# EAGLE board RedBot Accelerometer-Panel (EAGLE 9.6.0), part 1 of 6
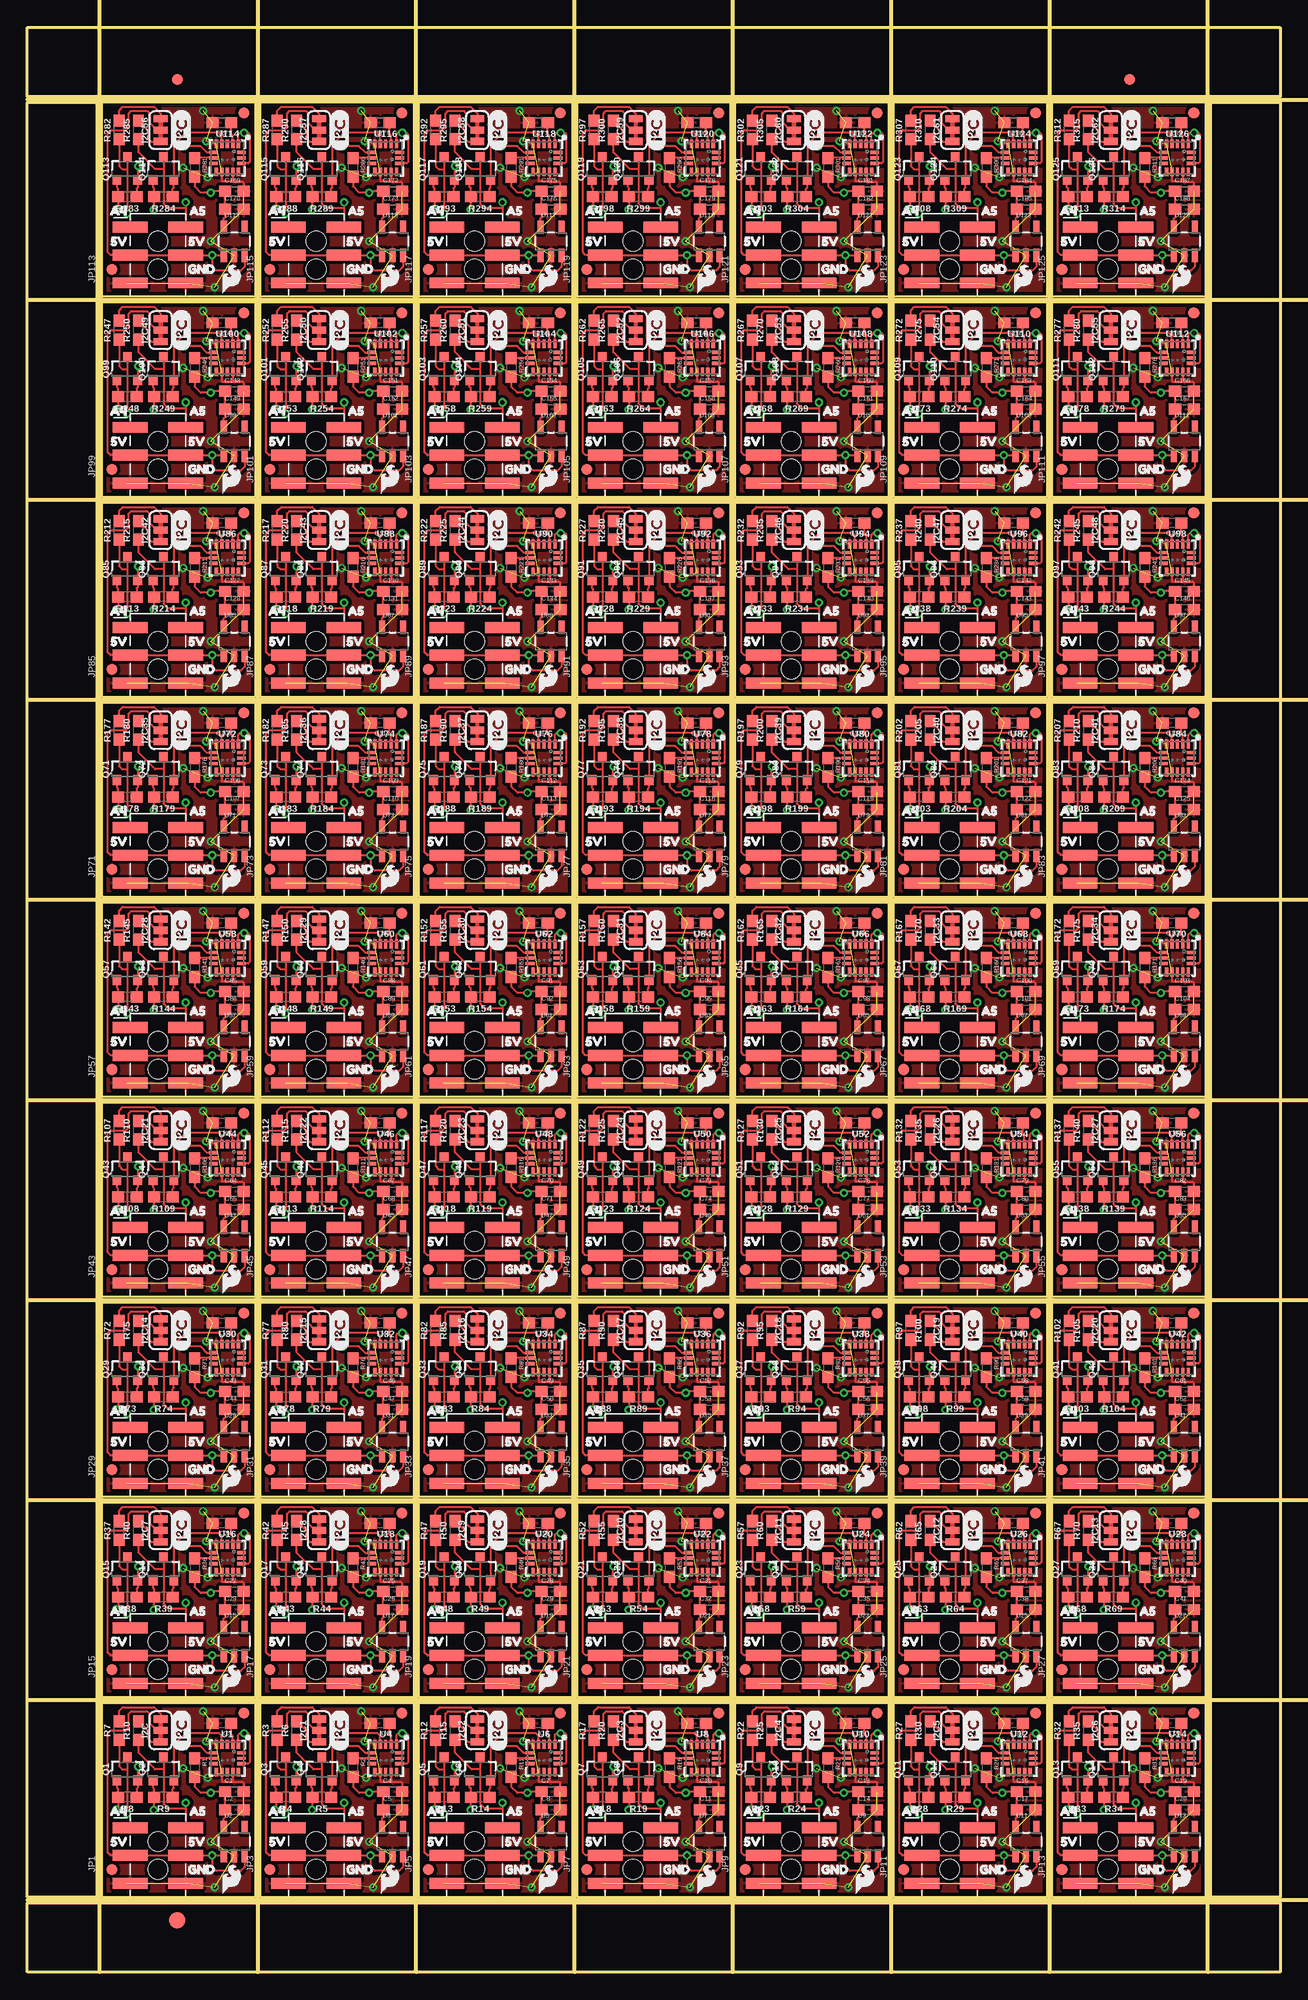
[diagram p0: board, top side]
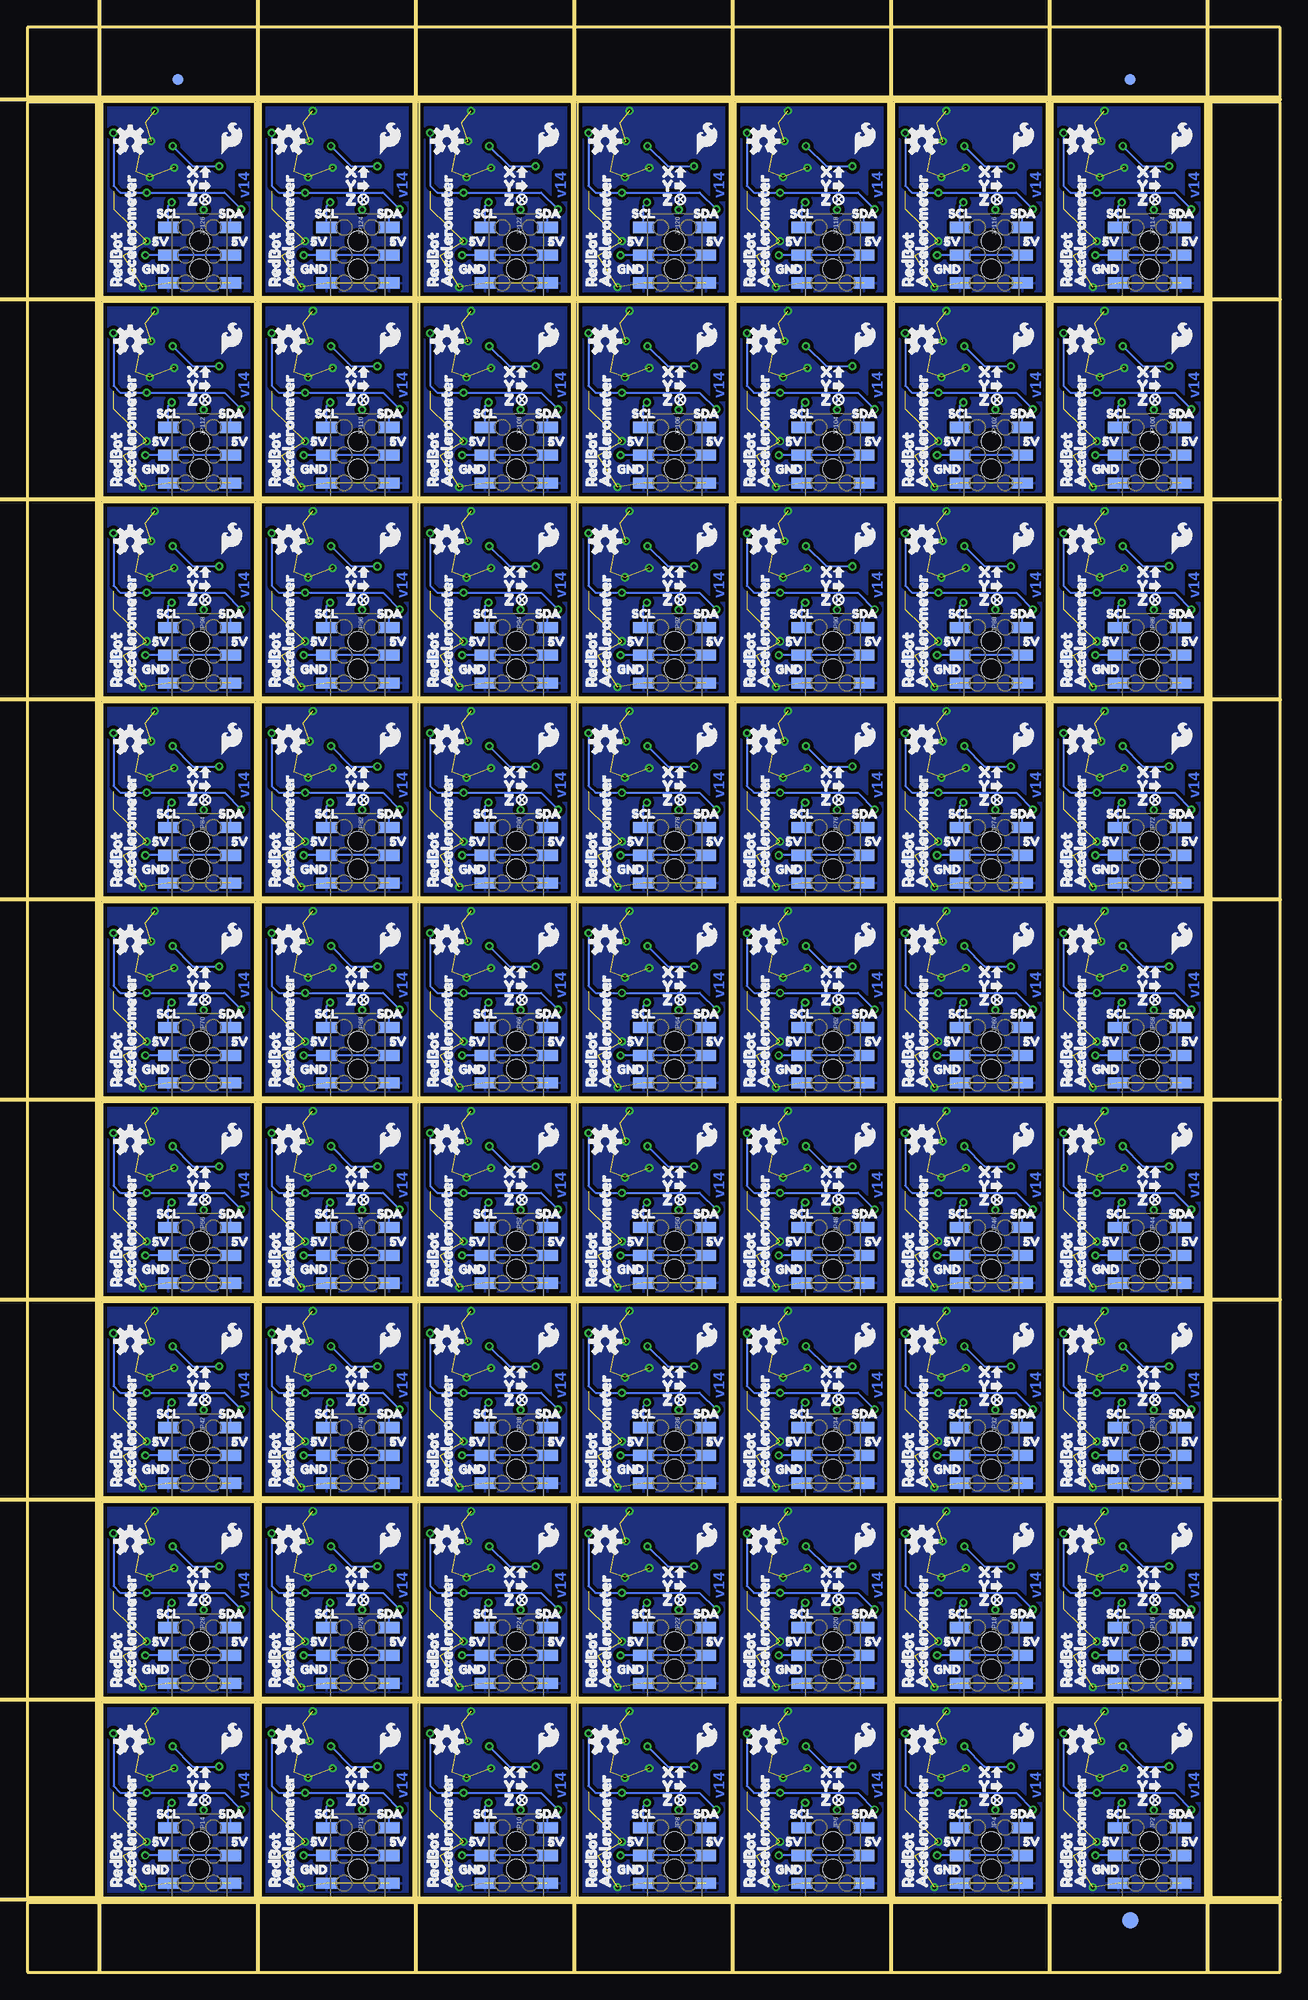
[diagram p1: board, bottom side, seen from below]

Size 114.55 x 177.8 mm. Coordinates in mm from the lower left corner, seen from the top.
Outline: 268 segments
Copper layers (1*16): Top 0.035mm / dielectric 1.5mm / Bottom 0.035mm
Design rules "RedBot": minimum track width 7mil, minimum drill 15mil, track to track 7mil, track to pad 7mil, pad to pad 7mil, via to via 7mil, smd to smd 7mil, copper to edge 7mil, drill to drill 7mil, minimum pad ring 7mil, minimum via ring 7mil, stop-mask expansion 4mil, vias tented up to drill 25mil, thermal gap 10mil
Milling: 18 lines

## Footprints (pad centres in the part's own frame; a part is rotated, then mirrored left to right if it is on the bottom)
0603 = smd 1.1 x 1: 1 -0.85,0; 2 0.85,0
FIDUCIAL-1X2 = smd 1 x 1: 1 0,0
FIDUCIAL-1.5X3 = smd 1.5 x 1.5: 1 0,0
SMT-JUMPER_3_2-NC_TRACE_SILK = smd 0.66 x 1.27: 1 -1.041,0; 2 0,0; 3 1.041,0
2X3_SMT_POSTS = smd 1 x 3.17: 1 -2.54,-2.54; 2 -2.54,2.54; 3 0,-2.54; 4 0,2.54; 5 2.54,-2.54; 6 2.54,2.54 | hole 1.8: -1.27,0; 1.27,0
2X3_SMD = smd 1.02 x 1.9: 1 -2.54,-2.85; 2 -2.54,2.85; 3 0,-2.85; 4 0,2.85; 5 2.54,-2.85; 6 2.54,2.85
SOT23-3 = smd 0.8 x 0.9: 1 -0.95,-1; 2 0.95,-1; 3 0,1.1
QFN-16 = smd 0.8 x 0.3: 1 -1.275,1; 2 -1.275,0.5; 3 -1.275,0; 4 -1.275,-0.5; 5 -1.275,-1; 9 1.275,-1; 10 1.275,-0.5; 11 1.275,0; 12 1.275,0.5; 13 1.275,1 | smd 0.3 x 0.8: 6 -0.5,-1.275; 7 0,-1.275; 8 0.5,-1.275; 14 0.5,1.275; 15 0,1.275; 16 -0.5,1.275
SOT23-5 = smd 0.55 x 1.2: 1 -0.95,-1.3; 2 0,-1.3; 3 0.95,-1.3; 4 0.95,1.3; 5 -0.95,1.3

## Placement (x,y rotation side)
C1  0.1uF  [0603]  18.92,16.51 0 top
C2  4.7uF  [0603]  18.92,14.86 0 top
C3  0.1uF  [0603]  17.78,22.76 180 top
C4  0.1uF  [0603]  33.4,16.51 0 top
C5  4.7uF  [0603]  33.4,14.86 0 top
C6  0.1uF  [0603]  32.26,22.76 180 top
C7  0.1uF  [0603]  47.88,16.51 0 top
C8  4.7uF  [0603]  47.88,14.86 0 top
C9  0.1uF  [0603]  46.74,22.76 180 top
C10  0.1uF  [0603]  62.36,16.51 0 top
C11  4.7uF  [0603]  62.36,14.86 0 top
C12  0.1uF  [0603]  61.21,22.76 180 top
C13  0.1uF  [0603]  76.84,16.51 0 top
C14  4.7uF  [0603]  76.84,14.86 0 top
C15  0.1uF  [0603]  75.69,22.76 180 top
C16  0.1uF  [0603]  91.31,16.51 0 top
C17  4.7uF  [0603]  91.31,14.86 0 top
C18  0.1uF  [0603]  90.17,22.76 180 top
C19  0.1uF  [0603]  105.79,16.51 0 top
C20  4.7uF  [0603]  105.79,14.86 0 top
C21  0.1uF  [0603]  104.65,22.76 180 top
C22  0.1uF  [0603]  18.92,34.8 0 top
C23  4.7uF  [0603]  18.92,33.15 0 top
C24  0.1uF  [0603]  17.78,41.05 180 top
C25  0.1uF  [0603]  33.4,34.8 0 top
C26  4.7uF  [0603]  33.4,33.15 0 top
C27  0.1uF  [0603]  32.26,41.05 180 top
C28  0.1uF  [0603]  47.88,34.8 0 top
C29  4.7uF  [0603]  47.88,33.15 0 top
C30  0.1uF  [0603]  46.74,41.05 180 top
C31  0.1uF  [0603]  62.36,34.8 0 top
C32  4.7uF  [0603]  62.36,33.15 0 top
C33  0.1uF  [0603]  61.21,41.05 180 top
C34  0.1uF  [0603]  76.84,34.8 0 top
C35  4.7uF  [0603]  76.84,33.15 0 top
C36  0.1uF  [0603]  75.69,41.05 180 top
C37  0.1uF  [0603]  91.31,34.8 0 top
C38  4.7uF  [0603]  91.31,33.15 0 top
C39  0.1uF  [0603]  90.17,41.05 180 top
C40  0.1uF  [0603]  105.79,34.8 0 top
C41  4.7uF  [0603]  105.79,33.15 0 top
C42  0.1uF  [0603]  104.65,41.05 180 top
C43  0.1uF  [0603]  18.92,53.09 0 top
C44  4.7uF  [0603]  18.92,51.43 0 top
C45  0.1uF  [0603]  17.78,59.34 180 top
C46  0.1uF  [0603]  33.4,53.09 0 top
C47  4.7uF  [0603]  33.4,51.43 0 top
C48  0.1uF  [0603]  32.26,59.34 180 top
C49  0.1uF  [0603]  47.88,53.09 0 top
C50  4.7uF  [0603]  47.88,51.43 0 top
C51  0.1uF  [0603]  46.74,59.34 180 top
C52  0.1uF  [0603]  62.36,53.09 0 top
C53  4.7uF  [0603]  62.36,51.43 0 top
C54  0.1uF  [0603]  61.21,59.34 180 top
C55  0.1uF  [0603]  76.84,53.09 0 top
C56  4.7uF  [0603]  76.84,51.43 0 top
C57  0.1uF  [0603]  75.69,59.34 180 top
C58  0.1uF  [0603]  91.31,53.09 0 top
C59  4.7uF  [0603]  91.31,51.43 0 top
C60  0.1uF  [0603]  90.17,59.34 180 top
C61  0.1uF  [0603]  105.79,53.09 0 top
C62  4.7uF  [0603]  105.79,51.43 0 top
C63  0.1uF  [0603]  104.65,59.34 180 top
C64  0.1uF  [0603]  18.92,71.37 0 top
C65  4.7uF  [0603]  18.92,69.72 0 top
C66  0.1uF  [0603]  17.78,77.62 180 top
C67  0.1uF  [0603]  33.4,71.37 0 top
C68  4.7uF  [0603]  33.4,69.72 0 top
C69  0.1uF  [0603]  32.26,77.62 180 top
C70  0.1uF  [0603]  47.88,71.37 0 top
C71  4.7uF  [0603]  47.88,69.72 0 top
C72  0.1uF  [0603]  46.74,77.62 180 top
C73  0.1uF  [0603]  62.36,71.37 0 top
C74  4.7uF  [0603]  62.36,69.72 0 top
C75  0.1uF  [0603]  61.21,77.62 180 top
C76  0.1uF  [0603]  76.84,71.37 0 top
C77  4.7uF  [0603]  76.84,69.72 0 top
C78  0.1uF  [0603]  75.69,77.62 180 top
C79  0.1uF  [0603]  91.31,71.37 0 top
C80  4.7uF  [0603]  91.31,69.72 0 top
C81  0.1uF  [0603]  90.17,77.62 180 top
C82  0.1uF  [0603]  105.79,71.37 0 top
C83  4.7uF  [0603]  105.79,69.72 0 top
C84  0.1uF  [0603]  104.65,77.62 180 top
C85  0.1uF  [0603]  18.92,89.66 0 top
C86  4.7uF  [0603]  18.92,88.01 0 top
C87  0.1uF  [0603]  17.78,95.91 180 top
C88  0.1uF  [0603]  33.4,89.66 0 top
C89  4.7uF  [0603]  33.4,88.01 0 top
C90  0.1uF  [0603]  32.26,95.91 180 top
C91  0.1uF  [0603]  47.88,89.66 0 top
C92  4.7uF  [0603]  47.88,88.01 0 top
C93  0.1uF  [0603]  46.74,95.91 180 top
C94  0.1uF  [0603]  62.36,89.66 0 top
C95  4.7uF  [0603]  62.36,88.01 0 top
C96  0.1uF  [0603]  61.21,95.91 180 top
C97  0.1uF  [0603]  76.84,89.66 0 top
C98  4.7uF  [0603]  76.84,88.01 0 top
C99  0.1uF  [0603]  75.69,95.91 180 top
C100  0.1uF  [0603]  91.31,89.66 0 top
C101  4.7uF  [0603]  91.31,88.01 0 top
C102  0.1uF  [0603]  90.17,95.91 180 top
C103  0.1uF  [0603]  105.79,89.66 0 top
C104  4.7uF  [0603]  105.79,88.01 0 top
C105  0.1uF  [0603]  104.65,95.91 180 top
C106  0.1uF  [0603]  18.92,107.95 0 top
C107  4.7uF  [0603]  18.92,106.3 0 top
C108  0.1uF  [0603]  17.78,114.2 180 top
C109  0.1uF  [0603]  33.4,107.95 0 top
C110  4.7uF  [0603]  33.4,106.3 0 top
C111  0.1uF  [0603]  32.26,114.2 180 top
C112  0.1uF  [0603]  47.88,107.95 0 top
C113  4.7uF  [0603]  47.88,106.3 0 top
C114  0.1uF  [0603]  46.74,114.2 180 top
C115  0.1uF  [0603]  62.36,107.95 0 top
C116  4.7uF  [0603]  62.36,106.3 0 top
C117  0.1uF  [0603]  61.21,114.2 180 top
C118  0.1uF  [0603]  76.84,107.95 0 top
C119  4.7uF  [0603]  76.84,106.3 0 top
C120  0.1uF  [0603]  75.69,114.2 180 top
C121  0.1uF  [0603]  91.31,107.95 0 top
C122  4.7uF  [0603]  91.31,106.3 0 top
C123  0.1uF  [0603]  90.17,114.2 180 top
C124  0.1uF  [0603]  105.79,107.95 0 top
C125  4.7uF  [0603]  105.79,106.3 0 top
C126  0.1uF  [0603]  104.65,114.2 180 top
C127  0.1uF  [0603]  18.92,126.24 0 top
C128  4.7uF  [0603]  18.92,124.59 0 top
C129  0.1uF  [0603]  17.78,132.49 180 top
C130  0.1uF  [0603]  33.4,126.24 0 top
C131  4.7uF  [0603]  33.4,124.59 0 top
C132  0.1uF  [0603]  32.26,132.49 180 top
C133  0.1uF  [0603]  47.88,126.24 0 top
C134  4.7uF  [0603]  47.88,124.59 0 top
C135  0.1uF  [0603]  46.74,132.49 180 top
C136  0.1uF  [0603]  62.36,126.24 0 top
C137  4.7uF  [0603]  62.36,124.59 0 top
C138  0.1uF  [0603]  61.21,132.49 180 top
C139  0.1uF  [0603]  76.84,126.24 0 top
C140  4.7uF  [0603]  76.84,124.59 0 top
C141  0.1uF  [0603]  75.69,132.49 180 top
C142  0.1uF  [0603]  91.31,126.24 0 top
C143  4.7uF  [0603]  91.31,124.59 0 top
C144  0.1uF  [0603]  90.17,132.49 180 top
C145  0.1uF  [0603]  105.79,126.24 0 top
C146  4.7uF  [0603]  105.79,124.59 0 top
C147  0.1uF  [0603]  104.65,132.49 180 top
C148  0.1uF  [0603]  18.92,144.53 0 top
C149  4.7uF  [0603]  18.92,142.88 0 top
C150  0.1uF  [0603]  17.78,150.78 180 top
C151  0.1uF  [0603]  33.4,144.53 0 top
C152  4.7uF  [0603]  33.4,142.88 0 top
C153  0.1uF  [0603]  32.26,150.78 180 top
C154  0.1uF  [0603]  47.88,144.53 0 top
C155  4.7uF  [0603]  47.88,142.88 0 top
C156  0.1uF  [0603]  46.74,150.78 180 top
C157  0.1uF  [0603]  62.36,144.53 0 top
C158  4.7uF  [0603]  62.36,142.88 0 top
C159  0.1uF  [0603]  61.21,150.78 180 top
C160  0.1uF  [0603]  76.84,144.53 0 top
C161  4.7uF  [0603]  76.84,142.88 0 top
C162  0.1uF  [0603]  75.69,150.78 180 top
C163  0.1uF  [0603]  91.31,144.53 0 top
C164  4.7uF  [0603]  91.31,142.88 0 top
C165  0.1uF  [0603]  90.17,150.78 180 top
C166  0.1uF  [0603]  105.79,144.53 0 top
C167  4.7uF  [0603]  105.79,142.88 0 top
C168  0.1uF  [0603]  104.65,150.78 180 top
C169  0.1uF  [0603]  18.92,162.81 0 top
C170  4.7uF  [0603]  18.92,161.16 0 top
C171  0.1uF  [0603]  17.78,169.06 180 top
C172  0.1uF  [0603]  33.4,162.81 0 top
C173  4.7uF  [0603]  33.4,161.16 0 top
C174  0.1uF  [0603]  32.26,169.06 180 top
C175  0.1uF  [0603]  47.88,162.81 0 top
C176  4.7uF  [0603]  47.88,161.16 0 top
C177  0.1uF  [0603]  46.74,169.06 180 top
C178  0.1uF  [0603]  62.36,162.81 0 top
C179  4.7uF  [0603]  62.36,161.16 0 top
C180  0.1uF  [0603]  61.21,169.06 180 top
C181  0.1uF  [0603]  76.84,162.81 0 top
C182  4.7uF  [0603]  76.84,161.16 0 top
C183  0.1uF  [0603]  75.69,169.06 180 top
C184  0.1uF  [0603]  91.31,162.81 0 top
C185  4.7uF  [0603]  91.31,161.16 0 top
C186  0.1uF  [0603]  90.17,169.06 180 top
C187  0.1uF  [0603]  105.79,162.81 0 top
C188  4.7uF  [0603]  105.79,161.16 0 top
C189  0.1uF  [0603]  104.65,169.06 180 top
E$1  [FIDUCIAL-1X2]  13.72,173.04 0 top
E$2  [FIDUCIAL-1X2]  13.72,173.04 0 bottom
E$3  [FIDUCIAL-1X2]  100.77,173.04 0 top
E$4  [FIDUCIAL-1X2]  100.77,173.04 0 bottom
E$5  [FIDUCIAL-1.5X3]  13.72,4.76 0 top
E$6  [FIDUCIAL-1.5X3]  13.72,4.76 0 bottom
FID1  FIDUCIAL1X2  [FIDUCIAL-1X2]  19.79,23.67 0 top
FID2  FIDUCIAL1X2  [FIDUCIAL-1X2]  22.2,9.37 0 top
FID3  FIDUCIAL1X2  [FIDUCIAL-1X2]  7.72,9.37 0 top
FID4  FIDUCIAL1X2  [FIDUCIAL-1X2]  34.26,23.67 0 top
FID5  FIDUCIAL1X2  [FIDUCIAL-1X2]  36.68,9.37 0 top
FID6  FIDUCIAL1X2  [FIDUCIAL-1X2]  48.74,23.67 0 top
FID7  FIDUCIAL1X2  [FIDUCIAL-1X2]  51.16,9.37 0 top
FID8  FIDUCIAL1X2  [FIDUCIAL-1X2]  63.22,23.67 0 top
FID9  FIDUCIAL1X2  [FIDUCIAL-1X2]  65.63,9.37 0 top
FID10  FIDUCIAL1X2  [FIDUCIAL-1X2]  77.7,23.67 0 top
FID11  FIDUCIAL1X2  [FIDUCIAL-1X2]  80.11,9.37 0 top
FID12  FIDUCIAL1X2  [FIDUCIAL-1X2]  92.18,23.67 0 top
FID13  FIDUCIAL1X2  [FIDUCIAL-1X2]  94.59,9.37 0 top
FID14  FIDUCIAL1X2  [FIDUCIAL-1X2]  106.65,23.67 0 top
FID15  FIDUCIAL1X2  [FIDUCIAL-1X2]  7.72,27.66 0 top
FID16  FIDUCIAL1X2  [FIDUCIAL-1X2]  19.79,41.96 0 top
FID17  FIDUCIAL1X2  [FIDUCIAL-1X2]  22.2,27.66 0 top
FID18  FIDUCIAL1X2  [FIDUCIAL-1X2]  34.26,41.96 0 top
FID19  FIDUCIAL1X2  [FIDUCIAL-1X2]  36.68,27.66 0 top
FID20  FIDUCIAL1X2  [FIDUCIAL-1X2]  48.74,41.96 0 top
FID21  FIDUCIAL1X2  [FIDUCIAL-1X2]  51.16,27.66 0 top
FID22  FIDUCIAL1X2  [FIDUCIAL-1X2]  63.22,41.96 0 top
FID23  FIDUCIAL1X2  [FIDUCIAL-1X2]  65.63,27.66 0 top
FID24  FIDUCIAL1X2  [FIDUCIAL-1X2]  77.7,41.96 0 top
FID25  FIDUCIAL1X2  [FIDUCIAL-1X2]  80.11,27.66 0 top
FID26  FIDUCIAL1X2  [FIDUCIAL-1X2]  92.18,41.96 0 top
FID27  FIDUCIAL1X2  [FIDUCIAL-1X2]  94.59,27.66 0 top
FID28  FIDUCIAL1X2  [FIDUCIAL-1X2]  106.65,41.96 0 top
FID29  FIDUCIAL1X2  [FIDUCIAL-1X2]  7.72,45.95 0 top
FID30  FIDUCIAL1X2  [FIDUCIAL-1X2]  19.79,60.25 0 top
FID31  FIDUCIAL1X2  [FIDUCIAL-1X2]  22.2,45.95 0 top
FID32  FIDUCIAL1X2  [FIDUCIAL-1X2]  34.26,60.25 0 top
FID33  FIDUCIAL1X2  [FIDUCIAL-1X2]  36.68,45.95 0 top
FID34  FIDUCIAL1X2  [FIDUCIAL-1X2]  48.74,60.25 0 top
FID35  FIDUCIAL1X2  [FIDUCIAL-1X2]  51.16,45.95 0 top
FID36  FIDUCIAL1X2  [FIDUCIAL-1X2]  63.22,60.25 0 top
FID37  FIDUCIAL1X2  [FIDUCIAL-1X2]  65.63,45.95 0 top
FID38  FIDUCIAL1X2  [FIDUCIAL-1X2]  77.7,60.25 0 top
FID39  FIDUCIAL1X2  [FIDUCIAL-1X2]  80.11,45.95 0 top
FID40  FIDUCIAL1X2  [FIDUCIAL-1X2]  92.18,60.25 0 top
FID41  FIDUCIAL1X2  [FIDUCIAL-1X2]  94.59,45.95 0 top
FID42  FIDUCIAL1X2  [FIDUCIAL-1X2]  106.65,60.25 0 top
FID43  FIDUCIAL1X2  [FIDUCIAL-1X2]  7.72,64.24 0 top
FID44  FIDUCIAL1X2  [FIDUCIAL-1X2]  19.79,78.54 0 top
FID45  FIDUCIAL1X2  [FIDUCIAL-1X2]  22.2,64.24 0 top
FID46  FIDUCIAL1X2  [FIDUCIAL-1X2]  34.26,78.54 0 top
FID47  FIDUCIAL1X2  [FIDUCIAL-1X2]  36.68,64.24 0 top
FID48  FIDUCIAL1X2  [FIDUCIAL-1X2]  48.74,78.54 0 top
FID49  FIDUCIAL1X2  [FIDUCIAL-1X2]  51.16,64.24 0 top
FID50  FIDUCIAL1X2  [FIDUCIAL-1X2]  63.22,78.54 0 top
FID51  FIDUCIAL1X2  [FIDUCIAL-1X2]  65.63,64.24 0 top
FID52  FIDUCIAL1X2  [FIDUCIAL-1X2]  77.7,78.54 0 top
FID53  FIDUCIAL1X2  [FIDUCIAL-1X2]  80.11,64.24 0 top
FID54  FIDUCIAL1X2  [FIDUCIAL-1X2]  92.18,78.54 0 top
FID55  FIDUCIAL1X2  [FIDUCIAL-1X2]  94.59,64.24 0 top
FID56  FIDUCIAL1X2  [FIDUCIAL-1X2]  106.65,78.54 0 top
FID57  FIDUCIAL1X2  [FIDUCIAL-1X2]  7.72,82.52 0 top
FID58  FIDUCIAL1X2  [FIDUCIAL-1X2]  19.79,96.82 0 top
FID59  FIDUCIAL1X2  [FIDUCIAL-1X2]  22.2,82.52 0 top
FID60  FIDUCIAL1X2  [FIDUCIAL-1X2]  34.26,96.82 0 top
FID61  FIDUCIAL1X2  [FIDUCIAL-1X2]  36.68,82.52 0 top
FID62  FIDUCIAL1X2  [FIDUCIAL-1X2]  48.74,96.82 0 top
FID63  FIDUCIAL1X2  [FIDUCIAL-1X2]  51.16,82.52 0 top
FID64  FIDUCIAL1X2  [FIDUCIAL-1X2]  63.22,96.82 0 top
FID65  FIDUCIAL1X2  [FIDUCIAL-1X2]  65.63,82.52 0 top
FID66  FIDUCIAL1X2  [FIDUCIAL-1X2]  77.7,96.82 0 top
FID67  FIDUCIAL1X2  [FIDUCIAL-1X2]  80.11,82.52 0 top
FID68  FIDUCIAL1X2  [FIDUCIAL-1X2]  92.18,96.82 0 top
FID69  FIDUCIAL1X2  [FIDUCIAL-1X2]  94.59,82.52 0 top
FID70  FIDUCIAL1X2  [FIDUCIAL-1X2]  106.65,96.82 0 top
FID71  FIDUCIAL1X2  [FIDUCIAL-1X2]  7.72,100.81 0 top
FID72  FIDUCIAL1X2  [FIDUCIAL-1X2]  19.79,115.11 0 top
FID73  FIDUCIAL1X2  [FIDUCIAL-1X2]  22.2,100.81 0 top
FID74  FIDUCIAL1X2  [FIDUCIAL-1X2]  34.26,115.11 0 top
FID75  FIDUCIAL1X2  [FIDUCIAL-1X2]  36.68,100.81 0 top
FID76  FIDUCIAL1X2  [FIDUCIAL-1X2]  48.74,115.11 0 top
FID77  FIDUCIAL1X2  [FIDUCIAL-1X2]  51.16,100.81 0 top
FID78  FIDUCIAL1X2  [FIDUCIAL-1X2]  63.22,115.11 0 top
FID79  FIDUCIAL1X2  [FIDUCIAL-1X2]  65.63,100.81 0 top
FID80  FIDUCIAL1X2  [FIDUCIAL-1X2]  77.7,115.11 0 top
FID81  FIDUCIAL1X2  [FIDUCIAL-1X2]  80.11,100.81 0 top
FID82  FIDUCIAL1X2  [FIDUCIAL-1X2]  92.18,115.11 0 top
FID83  FIDUCIAL1X2  [FIDUCIAL-1X2]  94.59,100.81 0 top
FID84  FIDUCIAL1X2  [FIDUCIAL-1X2]  106.65,115.11 0 top
FID85  FIDUCIAL1X2  [FIDUCIAL-1X2]  7.72,119.1 0 top
FID86  FIDUCIAL1X2  [FIDUCIAL-1X2]  19.79,133.4 0 top
FID87  FIDUCIAL1X2  [FIDUCIAL-1X2]  22.2,119.1 0 top
FID88  FIDUCIAL1X2  [FIDUCIAL-1X2]  34.26,133.4 0 top
FID89  FIDUCIAL1X2  [FIDUCIAL-1X2]  36.68,119.1 0 top
FID90  FIDUCIAL1X2  [FIDUCIAL-1X2]  48.74,133.4 0 top
FID91  FIDUCIAL1X2  [FIDUCIAL-1X2]  51.16,119.1 0 top
FID92  FIDUCIAL1X2  [FIDUCIAL-1X2]  63.22,133.4 0 top
FID93  FIDUCIAL1X2  [FIDUCIAL-1X2]  65.63,119.1 0 top
FID94  FIDUCIAL1X2  [FIDUCIAL-1X2]  77.7,133.4 0 top
FID95  FIDUCIAL1X2  [FIDUCIAL-1X2]  80.11,119.1 0 top
FID96  FIDUCIAL1X2  [FIDUCIAL-1X2]  92.18,133.4 0 top
FID97  FIDUCIAL1X2  [FIDUCIAL-1X2]  94.59,119.1 0 top
FID98  FIDUCIAL1X2  [FIDUCIAL-1X2]  106.65,133.4 0 top
FID99  FIDUCIAL1X2  [FIDUCIAL-1X2]  7.72,137.39 0 top
FID100  FIDUCIAL1X2  [FIDUCIAL-1X2]  19.79,151.69 0 top
FID101  FIDUCIAL1X2  [FIDUCIAL-1X2]  22.2,137.39 0 top
FID102  FIDUCIAL1X2  [FIDUCIAL-1X2]  34.26,151.69 0 top
FID103  FIDUCIAL1X2  [FIDUCIAL-1X2]  36.68,137.39 0 top
FID104  FIDUCIAL1X2  [FIDUCIAL-1X2]  48.74,151.69 0 top
FID105  FIDUCIAL1X2  [FIDUCIAL-1X2]  51.16,137.39 0 top
FID106  FIDUCIAL1X2  [FIDUCIAL-1X2]  63.22,151.69 0 top
FID107  FIDUCIAL1X2  [FIDUCIAL-1X2]  65.63,137.39 0 top
FID108  FIDUCIAL1X2  [FIDUCIAL-1X2]  77.7,151.69 0 top
FID109  FIDUCIAL1X2  [FIDUCIAL-1X2]  80.11,137.39 0 top
FID110  FIDUCIAL1X2  [FIDUCIAL-1X2]  92.18,151.69 0 top
FID111  FIDUCIAL1X2  [FIDUCIAL-1X2]  94.59,137.39 0 top
FID112  FIDUCIAL1X2  [FIDUCIAL-1X2]  106.65,151.69 0 top
FID113  FIDUCIAL1X2  [FIDUCIAL-1X2]  7.72,155.68 0 top
FID114  FIDUCIAL1X2  [FIDUCIAL-1X2]  19.79,169.98 0 top
FID115  FIDUCIAL1X2  [FIDUCIAL-1X2]  22.2,155.68 0 top
FID116  FIDUCIAL1X2  [FIDUCIAL-1X2]  34.26,169.98 0 top
FID117  FIDUCIAL1X2  [FIDUCIAL-1X2]  36.68,155.68 0 top
FID118  FIDUCIAL1X2  [FIDUCIAL-1X2]  48.74,169.98 0 top
FID119  FIDUCIAL1X2  [FIDUCIAL-1X2]  51.16,155.68 0 top
FID120  FIDUCIAL1X2  [FIDUCIAL-1X2]  63.22,169.98 0 top
FID121  FIDUCIAL1X2  [FIDUCIAL-1X2]  65.63,155.68 0 top
FID122  FIDUCIAL1X2  [FIDUCIAL-1X2]  77.7,169.98 0 top
FID123  FIDUCIAL1X2  [FIDUCIAL-1X2]  80.11,155.68 0 top
FID124  FIDUCIAL1X2  [FIDUCIAL-1X2]  92.18,169.98 0 top
FID125  FIDUCIAL1X2  [FIDUCIAL-1X2]  94.59,155.68 0 top
FID126  FIDUCIAL1X2  [FIDUCIAL-1X2]  106.65,169.98 0 top
I2C  JUMPER-SMT_3_2-NC_TRACE_SILK  [SMT-JUMPER_3_2-NC_TRACE_SILK]  12.19,22.1 90 top
I2C1  JUMPER-SMT_3_2-NC_TRACE_SILK  [SMT-JUMPER_3_2-NC_TRACE_SILK]  26.67,22.1 90 top
I2C2  JUMPER-SMT_3_2-NC_TRACE_SILK  [SMT-JUMPER_3_2-NC_TRACE_SILK]  41.15,22.1 90 top
I2C3  JUMPER-SMT_3_2-NC_TRACE_SILK  [SMT-JUMPER_3_2-NC_TRACE_SILK]  55.63,22.1 90 top
I2C4  JUMPER-SMT_3_2-NC_TRACE_SILK  [SMT-JUMPER_3_2-NC_TRACE_SILK]  70.1,22.1 90 top
I2C5  JUMPER-SMT_3_2-NC_TRACE_SILK  [SMT-JUMPER_3_2-NC_TRACE_SILK]  84.58,22.1 90 top
I2C6  JUMPER-SMT_3_2-NC_TRACE_SILK  [SMT-JUMPER_3_2-NC_TRACE_SILK]  99.06,22.1 90 top
I2C7  JUMPER-SMT_3_2-NC_TRACE_SILK  [SMT-JUMPER_3_2-NC_TRACE_SILK]  12.19,40.39 90 top
I2C8  JUMPER-SMT_3_2-NC_TRACE_SILK  [SMT-JUMPER_3_2-NC_TRACE_SILK]  26.67,40.39 90 top
I2C9  JUMPER-SMT_3_2-NC_TRACE_SILK  [SMT-JUMPER_3_2-NC_TRACE_SILK]  41.15,40.39 90 top
I2C10  JUMPER-SMT_3_2-NC_TRACE_SILK  [SMT-JUMPER_3_2-NC_TRACE_SILK]  55.63,40.39 90 top
I2C11  JUMPER-SMT_3_2-NC_TRACE_SILK  [SMT-JUMPER_3_2-NC_TRACE_SILK]  70.1,40.39 90 top
I2C12  JUMPER-SMT_3_2-NC_TRACE_SILK  [SMT-JUMPER_3_2-NC_TRACE_SILK]  84.58,40.39 90 top
I2C13  JUMPER-SMT_3_2-NC_TRACE_SILK  [SMT-JUMPER_3_2-NC_TRACE_SILK]  99.06,40.39 90 top
I2C14  JUMPER-SMT_3_2-NC_TRACE_SILK  [SMT-JUMPER_3_2-NC_TRACE_SILK]  12.19,58.67 90 top
I2C15  JUMPER-SMT_3_2-NC_TRACE_SILK  [SMT-JUMPER_3_2-NC_TRACE_SILK]  26.67,58.67 90 top
I2C16  JUMPER-SMT_3_2-NC_TRACE_SILK  [SMT-JUMPER_3_2-NC_TRACE_SILK]  41.15,58.67 90 top
I2C17  JUMPER-SMT_3_2-NC_TRACE_SILK  [SMT-JUMPER_3_2-NC_TRACE_SILK]  55.63,58.67 90 top
I2C18  JUMPER-SMT_3_2-NC_TRACE_SILK  [SMT-JUMPER_3_2-NC_TRACE_SILK]  70.1,58.67 90 top
I2C19  JUMPER-SMT_3_2-NC_TRACE_SILK  [SMT-JUMPER_3_2-NC_TRACE_SILK]  84.58,58.67 90 top
I2C20  JUMPER-SMT_3_2-NC_TRACE_SILK  [SMT-JUMPER_3_2-NC_TRACE_SILK]  99.06,58.67 90 top
I2C21  JUMPER-SMT_3_2-NC_TRACE_SILK  [SMT-JUMPER_3_2-NC_TRACE_SILK]  12.19,76.96 90 top
I2C22  JUMPER-SMT_3_2-NC_TRACE_SILK  [SMT-JUMPER_3_2-NC_TRACE_SILK]  26.67,76.96 90 top
I2C23  JUMPER-SMT_3_2-NC_TRACE_SILK  [SMT-JUMPER_3_2-NC_TRACE_SILK]  41.15,76.96 90 top
I2C24  JUMPER-SMT_3_2-NC_TRACE_SILK  [SMT-JUMPER_3_2-NC_TRACE_SILK]  55.63,76.96 90 top
I2C25  JUMPER-SMT_3_2-NC_TRACE_SILK  [SMT-JUMPER_3_2-NC_TRACE_SILK]  70.1,76.96 90 top
I2C26  JUMPER-SMT_3_2-NC_TRACE_SILK  [SMT-JUMPER_3_2-NC_TRACE_SILK]  84.58,76.96 90 top
I2C27  JUMPER-SMT_3_2-NC_TRACE_SILK  [SMT-JUMPER_3_2-NC_TRACE_SILK]  99.06,76.96 90 top
I2C28  JUMPER-SMT_3_2-NC_TRACE_SILK  [SMT-JUMPER_3_2-NC_TRACE_SILK]  12.19,95.25 90 top
I2C29  JUMPER-SMT_3_2-NC_TRACE_SILK  [SMT-JUMPER_3_2-NC_TRACE_SILK]  26.67,95.25 90 top
I2C30  JUMPER-SMT_3_2-NC_TRACE_SILK  [SMT-JUMPER_3_2-NC_TRACE_SILK]  41.15,95.25 90 top
I2C31  JUMPER-SMT_3_2-NC_TRACE_SILK  [SMT-JUMPER_3_2-NC_TRACE_SILK]  55.63,95.25 90 top
I2C32  JUMPER-SMT_3_2-NC_TRACE_SILK  [SMT-JUMPER_3_2-NC_TRACE_SILK]  70.1,95.25 90 top
I2C33  JUMPER-SMT_3_2-NC_TRACE_SILK  [SMT-JUMPER_3_2-NC_TRACE_SILK]  84.58,95.25 90 top
I2C34  JUMPER-SMT_3_2-NC_TRACE_SILK  [SMT-JUMPER_3_2-NC_TRACE_SILK]  99.06,95.25 90 top
I2C35  JUMPER-SMT_3_2-NC_TRACE_SILK  [SMT-JUMPER_3_2-NC_TRACE_SILK]  12.19,113.54 90 top
I2C36  JUMPER-SMT_3_2-NC_TRACE_SILK  [SMT-JUMPER_3_2-NC_TRACE_SILK]  26.67,113.54 90 top
I2C37  JUMPER-SMT_3_2-NC_TRACE_SILK  [SMT-JUMPER_3_2-NC_TRACE_SILK]  41.15,113.54 90 top
I2C38  JUMPER-SMT_3_2-NC_TRACE_SILK  [SMT-JUMPER_3_2-NC_TRACE_SILK]  55.63,113.54 90 top
I2C39  JUMPER-SMT_3_2-NC_TRACE_SILK  [SMT-JUMPER_3_2-NC_TRACE_SILK]  70.1,113.54 90 top
I2C40  JUMPER-SMT_3_2-NC_TRACE_SILK  [SMT-JUMPER_3_2-NC_TRACE_SILK]  84.58,113.54 90 top
I2C41  JUMPER-SMT_3_2-NC_TRACE_SILK  [SMT-JUMPER_3_2-NC_TRACE_SILK]  99.06,113.54 90 top
I2C42  JUMPER-SMT_3_2-NC_TRACE_SILK  [SMT-JUMPER_3_2-NC_TRACE_SILK]  12.19,131.83 90 top
I2C43  JUMPER-SMT_3_2-NC_TRACE_SILK  [SMT-JUMPER_3_2-NC_TRACE_SILK]  26.67,131.83 90 top
I2C44  JUMPER-SMT_3_2-NC_TRACE_SILK  [SMT-JUMPER_3_2-NC_TRACE_SILK]  41.15,131.83 90 top
I2C45  JUMPER-SMT_3_2-NC_TRACE_SILK  [SMT-JUMPER_3_2-NC_TRACE_SILK]  55.63,131.83 90 top
I2C46  JUMPER-SMT_3_2-NC_TRACE_SILK  [SMT-JUMPER_3_2-NC_TRACE_SILK]  70.1,131.83 90 top
I2C47  JUMPER-SMT_3_2-NC_TRACE_SILK  [SMT-JUMPER_3_2-NC_TRACE_SILK]  84.58,131.83 90 top
I2C48  JUMPER-SMT_3_2-NC_TRACE_SILK  [SMT-JUMPER_3_2-NC_TRACE_SILK]  99.06,131.83 90 top
I2C49  JUMPER-SMT_3_2-NC_TRACE_SILK  [SMT-JUMPER_3_2-NC_TRACE_SILK]  12.19,150.11 90 top
I2C50  JUMPER-SMT_3_2-NC_TRACE_SILK  [SMT-JUMPER_3_2-NC_TRACE_SILK]  26.67,150.11 90 top
I2C51  JUMPER-SMT_3_2-NC_TRACE_SILK  [SMT-JUMPER_3_2-NC_TRACE_SILK]  41.15,150.11 90 top
I2C52  JUMPER-SMT_3_2-NC_TRACE_SILK  [SMT-JUMPER_3_2-NC_TRACE_SILK]  55.63,150.11 90 top
I2C53  JUMPER-SMT_3_2-NC_TRACE_SILK  [SMT-JUMPER_3_2-NC_TRACE_SILK]  70.1,150.11 90 top
I2C54  JUMPER-SMT_3_2-NC_TRACE_SILK  [SMT-JUMPER_3_2-NC_TRACE_SILK]  84.58,150.11 90 top
I2C55  JUMPER-SMT_3_2-NC_TRACE_SILK  [SMT-JUMPER_3_2-NC_TRACE_SILK]  99.06,150.11 90 top
I2C56  JUMPER-SMT_3_2-NC_TRACE_SILK  [SMT-JUMPER_3_2-NC_TRACE_SILK]  12.19,168.4 90 top
I2C57  JUMPER-SMT_3_2-NC_TRACE_SILK  [SMT-JUMPER_3_2-NC_TRACE_SILK]  26.67,168.4 90 top
I2C58  JUMPER-SMT_3_2-NC_TRACE_SILK  [SMT-JUMPER_3_2-NC_TRACE_SILK]  41.15,168.4 90 top
I2C59  JUMPER-SMT_3_2-NC_TRACE_SILK  [SMT-JUMPER_3_2-NC_TRACE_SILK]  55.63,168.4 90 top
I2C60  JUMPER-SMT_3_2-NC_TRACE_SILK  [SMT-JUMPER_3_2-NC_TRACE_SILK]  70.1,168.4 90 top
I2C61  JUMPER-SMT_3_2-NC_TRACE_SILK  [SMT-JUMPER_3_2-NC_TRACE_SILK]  84.58,168.4 90 top
I2C62  JUMPER-SMT_3_2-NC_TRACE_SILK  [SMT-JUMPER_3_2-NC_TRACE_SILK]  99.06,168.4 90 top
JP1  [2X3_SMT_POSTS]  11.94,10.67 270 top
JP2  [2X3_SMD]  11.94,10.67 270 bottom
JP3  [2X3_SMT_POSTS]  26.42,10.67 270 top
JP4  [2X3_SMD]  26.42,10.67 270 bottom
JP5  [2X3_SMT_POSTS]  40.89,10.67 270 top
JP6  [2X3_SMD]  40.89,10.67 270 bottom
JP7  [2X3_SMT_POSTS]  55.37,10.67 270 top
JP8  [2X3_SMD]  55.37,10.67 270 bottom
JP9  [2X3_SMT_POSTS]  69.85,10.67 270 top
JP10  [2X3_SMD]  69.85,10.67 270 bottom
JP11  [2X3_SMT_POSTS]  84.33,10.67 270 top
JP12  [2X3_SMD]  84.33,10.67 270 bottom
JP13  [2X3_SMT_POSTS]  98.81,10.67 270 top
JP14  [2X3_SMD]  98.81,10.67 270 bottom
JP15  [2X3_SMT_POSTS]  11.94,28.96 270 top
JP16  [2X3_SMD]  11.94,28.96 270 bottom
JP17  [2X3_SMT_POSTS]  26.42,28.96 270 top
JP18  [2X3_SMD]  26.42,28.96 270 bottom
JP19  [2X3_SMT_POSTS]  40.89,28.96 270 top
JP20  [2X3_SMD]  40.89,28.96 270 bottom
JP21  [2X3_SMT_POSTS]  55.37,28.96 270 top
JP22  [2X3_SMD]  55.37,28.96 270 bottom
JP23  [2X3_SMT_POSTS]  69.85,28.96 270 top
JP24  [2X3_SMD]  69.85,28.96 270 bottom
JP25  [2X3_SMT_POSTS]  84.33,28.96 270 top
JP26  [2X3_SMD]  84.33,28.96 270 bottom
JP27  [2X3_SMT_POSTS]  98.81,28.96 270 top
JP28  [2X3_SMD]  98.81,28.96 270 bottom
JP29  [2X3_SMT_POSTS]  11.94,47.24 270 top
JP30  [2X3_SMD]  11.94,47.24 270 bottom
JP31  [2X3_SMT_POSTS]  26.42,47.24 270 top
JP32  [2X3_SMD]  26.42,47.24 270 bottom
JP33  [2X3_SMT_POSTS]  40.89,47.24 270 top
JP34  [2X3_SMD]  40.89,47.24 270 bottom
JP35  [2X3_SMT_POSTS]  55.37,47.24 270 top
JP36  [2X3_SMD]  55.37,47.24 270 bottom
JP37  [2X3_SMT_POSTS]  69.85,47.24 270 top
JP38  [2X3_SMD]  69.85,47.24 270 bottom
JP39  [2X3_SMT_POSTS]  84.33,47.24 270 top
JP40  [2X3_SMD]  84.33,47.24 270 bottom
JP41  [2X3_SMT_POSTS]  98.81,47.24 270 top
JP42  [2X3_SMD]  98.81,47.24 270 bottom
JP43  [2X3_SMT_POSTS]  11.94,65.53 270 top
JP44  [2X3_SMD]  11.94,65.53 270 bottom
JP45  [2X3_SMT_POSTS]  26.42,65.53 270 top
JP46  [2X3_SMD]  26.42,65.53 270 bottom
JP47  [2X3_SMT_POSTS]  40.89,65.53 270 top
JP48  [2X3_SMD]  40.89,65.53 270 bottom
JP49  [2X3_SMT_POSTS]  55.37,65.53 270 top
JP50  [2X3_SMD]  55.37,65.53 270 bottom
JP51  [2X3_SMT_POSTS]  69.85,65.53 270 top
JP52  [2X3_SMD]  69.85,65.53 270 bottom
JP53  [2X3_SMT_POSTS]  84.33,65.53 270 top
JP54  [2X3_SMD]  84.33,65.53 270 bottom
JP55  [2X3_SMT_POSTS]  98.81,65.53 270 top
JP56  [2X3_SMD]  98.81,65.53 270 bottom
JP57  [2X3_SMT_POSTS]  11.94,83.82 270 top
JP58  [2X3_SMD]  11.94,83.82 270 bottom
JP59  [2X3_SMT_POSTS]  26.42,83.82 270 top
JP60  [2X3_SMD]  26.42,83.82 270 bottom
JP61  [2X3_SMT_POSTS]  40.89,83.82 270 top
JP62  [2X3_SMD]  40.89,83.82 270 bottom
JP63  [2X3_SMT_POSTS]  55.37,83.82 270 top
JP64  [2X3_SMD]  55.37,83.82 270 bottom
JP65  [2X3_SMT_POSTS]  69.85,83.82 270 top
JP66  [2X3_SMD]  69.85,83.82 270 bottom
JP67  [2X3_SMT_POSTS]  84.33,83.82 270 top
JP68  [2X3_SMD]  84.33,83.82 270 bottom
JP69  [2X3_SMT_POSTS]  98.81,83.82 270 top
JP70  [2X3_SMD]  98.81,83.82 270 bottom
JP71  [2X3_SMT_POSTS]  11.94,102.11 270 top
JP72  [2X3_SMD]  11.94,102.11 270 bottom
JP73  [2X3_SMT_POSTS]  26.42,102.11 270 top
JP74  [2X3_SMD]  26.42,102.11 270 bottom
JP75  [2X3_SMT_POSTS]  40.89,102.11 270 top
JP76  [2X3_SMD]  40.89,102.11 270 bottom
JP77  [2X3_SMT_POSTS]  55.37,102.11 270 top
JP78  [2X3_SMD]  55.37,102.11 270 bottom
JP79  [2X3_SMT_POSTS]  69.85,102.11 270 top
JP80  [2X3_SMD]  69.85,102.11 270 bottom
JP81  [2X3_SMT_POSTS]  84.33,102.11 270 top
JP82  [2X3_SMD]  84.33,102.11 270 bottom
JP83  [2X3_SMT_POSTS]  98.81,102.11 270 top
JP84  [2X3_SMD]  98.81,102.11 270 bottom
JP85  [2X3_SMT_POSTS]  11.94,120.4 270 top
JP86  [2X3_SMD]  11.94,120.4 270 bottom
JP87  [2X3_SMT_POSTS]  26.42,120.4 270 top
JP88  [2X3_SMD]  26.42,120.4 270 bottom
JP89  [2X3_SMT_POSTS]  40.89,120.4 270 top
JP90  [2X3_SMD]  40.89,120.4 270 bottom
JP91  [2X3_SMT_POSTS]  55.37,120.4 270 top
JP92  [2X3_SMD]  55.37,120.4 270 bottom
JP93  [2X3_SMT_POSTS]  69.85,120.4 270 top
JP94  [2X3_SMD]  69.85,120.4 270 bottom
JP95  [2X3_SMT_POSTS]  84.33,120.4 270 top
JP96  [2X3_SMD]  84.33,120.4 270 bottom
JP97  [2X3_SMT_POSTS]  98.81,120.4 270 top
JP98  [2X3_SMD]  98.81,120.4 270 bottom
JP99  [2X3_SMT_POSTS]  11.94,138.68 270 top
JP100  [2X3_SMD]  11.94,138.68 270 bottom
JP101  [2X3_SMT_POSTS]  26.42,138.68 270 top
JP102  [2X3_SMD]  26.42,138.68 270 bottom
JP103  [2X3_SMT_POSTS]  40.89,138.68 270 top
JP104  [2X3_SMD]  40.89,138.68 270 bottom
JP105  [2X3_SMT_POSTS]  55.37,138.68 270 top
JP106  [2X3_SMD]  55.37,138.68 270 bottom
JP107  [2X3_SMT_POSTS]  69.85,138.68 270 top
JP108  [2X3_SMD]  69.85,138.68 270 bottom
JP109  [2X3_SMT_POSTS]  84.33,138.68 270 top
JP110  [2X3_SMD]  84.33,138.68 270 bottom
JP111  [2X3_SMT_POSTS]  98.81,138.68 270 top
JP112  [2X3_SMD]  98.81,138.68 270 bottom
JP113  [2X3_SMT_POSTS]  11.94,156.97 270 top
JP114  [2X3_SMD]  11.94,156.97 270 bottom
JP115  [2X3_SMT_POSTS]  26.42,156.97 270 top
JP116  [2X3_SMD]  26.42,156.97 270 bottom
JP117  [2X3_SMT_POSTS]  40.89,156.97 270 top
JP118  [2X3_SMD]  40.89,156.97 270 bottom
JP119  [2X3_SMT_POSTS]  55.37,156.97 270 top
JP120  [2X3_SMD]  55.37,156.97 270 bottom
JP121  [2X3_SMT_POSTS]  69.85,156.97 270 top
JP122  [2X3_SMD]  69.85,156.97 270 bottom
JP123  [2X3_SMT_POSTS]  84.33,156.97 270 top
JP124  [2X3_SMD]  84.33,156.97 270 bottom
JP125  [2X3_SMT_POSTS]  98.81,156.97 270 top
JP126  [2X3_SMD]  98.81,156.97 270 bottom
LOGO1  OSHW-LOGOS  [OSHW-LOGO-S]  32.77,21.08 0 bottom
LOGO2  OSHW-LOGOS  [OSHW-LOGO-S]  18.29,21.08 0 bottom
LOGO3  LOGO-SFESK  [SFE-LOGO-FLAME]  9.91,19.94 0 bottom
LOGO4  SFE_LOGO_FLAME.1_INCH  [SFE_LOGO_FLAME_.1]  18.67,8.51 0 top
LOGO5  LOGO-SFESK  [SFE-LOGO-FLAME]  24.38,19.94 0 bottom
LOGO6  SFE_LOGO_FLAME.1_INCH  [SFE_LOGO_FLAME_.1]  33.15,8.51 0 top
LOGO7  OSHW-LOGOS  [OSHW-LOGO-S]  47.24,21.08 0 bottom
LOGO8  LOGO-SFESK  [SFE-LOGO-FLAME]  38.86,19.94 0 bottom
LOGO9  SFE_LOGO_FLAME.1_INCH  [SFE_LOGO_FLAME_.1]  47.62,8.51 0 top
LOGO10  OSHW-LOGOS  [OSHW-LOGO-S]  61.72,21.08 0 bottom
LOGO11  LOGO-SFESK  [SFE-LOGO-FLAME]  53.34,19.94 0 bottom
LOGO12  SFE_LOGO_FLAME.1_INCH  [SFE_LOGO_FLAME_.1]  62.1,8.51 0 top
LOGO13  OSHW-LOGOS  [OSHW-LOGO-S]  76.2,21.08 0 bottom
LOGO14  LOGO-SFESK  [SFE-LOGO-FLAME]  67.82,19.94 0 bottom
LOGO15  SFE_LOGO_FLAME.1_INCH  [SFE_LOGO_FLAME_.1]  76.58,8.51 0 top
LOGO16  OSHW-LOGOS  [OSHW-LOGO-S]  90.68,21.08 0 bottom
LOGO17  LOGO-SFESK  [SFE-LOGO-FLAME]  82.3,19.94 0 bottom
LOGO18  SFE_LOGO_FLAME.1_INCH  [SFE_LOGO_FLAME_.1]  91.06,8.51 0 top
LOGO19  OSHW-LOGOS  [OSHW-LOGO-S]  105.16,21.08 0 bottom
LOGO20  LOGO-SFESK  [SFE-LOGO-FLAME]  96.77,19.94 0 bottom
LOGO21  SFE_LOGO_FLAME.1_INCH  [SFE_LOGO_FLAME_.1]  105.54,8.51 0 top
LOGO22  OSHW-LOGOS  [OSHW-LOGO-S]  18.29,39.37 0 bottom
LOGO23  LOGO-SFESK  [SFE-LOGO-FLAME]  9.91,38.23 0 bottom
LOGO24  SFE_LOGO_FLAME.1_INCH  [SFE_LOGO_FLAME_.1]  18.67,26.8 0 top
LOGO25  OSHW-LOGOS  [OSHW-LOGO-S]  32.77,39.37 0 bottom
LOGO26  LOGO-SFESK  [SFE-LOGO-FLAME]  24.38,38.23 0 bottom
LOGO27  SFE_LOGO_FLAME.1_INCH  [SFE_LOGO_FLAME_.1]  33.15,26.8 0 top
LOGO28  OSHW-LOGOS  [OSHW-LOGO-S]  47.24,39.37 0 bottom
LOGO29  LOGO-SFESK  [SFE-LOGO-FLAME]  38.86,38.23 0 bottom
LOGO30  SFE_LOGO_FLAME.1_INCH  [SFE_LOGO_FLAME_.1]  47.62,26.8 0 top
LOGO31  OSHW-LOGOS  [OSHW-LOGO-S]  61.72,39.37 0 bottom
LOGO32  LOGO-SFESK  [SFE-LOGO-FLAME]  53.34,38.23 0 bottom
LOGO33  SFE_LOGO_FLAME.1_INCH  [SFE_LOGO_FLAME_.1]  62.1,26.8 0 top
LOGO34  OSHW-LOGOS  [OSHW-LOGO-S]  76.2,39.37 0 bottom
LOGO35  LOGO-SFESK  [SFE-LOGO-FLAME]  67.82,38.23 0 bottom
LOGO36  SFE_LOGO_FLAME.1_INCH  [SFE_LOGO_FLAME_.1]  76.58,26.8 0 top
LOGO37  OSHW-LOGOS  [OSHW-LOGO-S]  90.68,39.37 0 bottom
LOGO38  LOGO-SFESK  [SFE-LOGO-FLAME]  82.3,38.23 0 bottom
LOGO39  SFE_LOGO_FLAME.1_INCH  [SFE_LOGO_FLAME_.1]  91.06,26.8 0 top
LOGO40  OSHW-LOGOS  [OSHW-LOGO-S]  105.16,39.37 0 bottom
LOGO41  LOGO-SFESK  [SFE-LOGO-FLAME]  96.77,38.23 0 bottom
LOGO42  SFE_LOGO_FLAME.1_INCH  [SFE_LOGO_FLAME_.1]  105.54,26.8 0 top
LOGO43  OSHW-LOGOS  [OSHW-LOGO-S]  18.29,57.66 0 bottom
LOGO44  LOGO-SFESK  [SFE-LOGO-FLAME]  9.91,56.51 0 bottom
LOGO45  SFE_LOGO_FLAME.1_INCH  [SFE_LOGO_FLAME_.1]  18.67,45.08 0 top
LOGO46  OSHW-LOGOS  [OSHW-LOGO-S]  32.77,57.66 0 bottom
LOGO47  LOGO-SFESK  [SFE-LOGO-FLAME]  24.38,56.51 0 bottom
LOGO48  SFE_LOGO_FLAME.1_INCH  [SFE_LOGO_FLAME_.1]  33.15,45.08 0 top
LOGO49  OSHW-LOGOS  [OSHW-LOGO-S]  47.24,57.66 0 bottom
LOGO50  LOGO-SFESK  [SFE-LOGO-FLAME]  38.86,56.51 0 bottom
LOGO51  SFE_LOGO_FLAME.1_INCH  [SFE_LOGO_FLAME_.1]  47.62,45.08 0 top
LOGO52  OSHW-LOGOS  [OSHW-LOGO-S]  61.72,57.66 0 bottom
LOGO53  LOGO-SFESK  [SFE-LOGO-FLAME]  53.34,56.51 0 bottom
LOGO54  SFE_LOGO_FLAME.1_INCH  [SFE_LOGO_FLAME_.1]  62.1,45.08 0 top
LOGO55  OSHW-LOGOS  [OSHW-LOGO-S]  76.2,57.66 0 bottom
LOGO56  LOGO-SFESK  [SFE-LOGO-FLAME]  67.82,56.51 0 bottom
LOGO57  SFE_LOGO_FLAME.1_INCH  [SFE_LOGO_FLAME_.1]  76.58,45.08 0 top
LOGO58  OSHW-LOGOS  [OSHW-LOGO-S]  90.68,57.66 0 bottom
LOGO59  LOGO-SFESK  [SFE-LOGO-FLAME]  82.3,56.51 0 bottom
LOGO60  SFE_LOGO_FLAME.1_INCH  [SFE_LOGO_FLAME_.1]  91.06,45.08 0 top
LOGO61  OSHW-LOGOS  [OSHW-LOGO-S]  105.16,57.66 0 bottom
LOGO62  LOGO-SFESK  [SFE-LOGO-FLAME]  96.77,56.51 0 bottom
LOGO63  SFE_LOGO_FLAME.1_INCH  [SFE_LOGO_FLAME_.1]  105.54,45.08 0 top
LOGO64  OSHW-LOGOS  [OSHW-LOGO-S]  18.29,75.95 0 bottom
LOGO65  LOGO-SFESK  [SFE-LOGO-FLAME]  9.91,74.8 0 bottom
LOGO66  SFE_LOGO_FLAME.1_INCH  [SFE_LOGO_FLAME_.1]  18.67,63.37 0 top
LOGO67  OSHW-LOGOS  [OSHW-LOGO-S]  32.77,75.95 0 bottom
LOGO68  LOGO-SFESK  [SFE-LOGO-FLAME]  24.38,74.8 0 bottom
LOGO69  SFE_LOGO_FLAME.1_INCH  [SFE_LOGO_FLAME_.1]  33.15,63.37 0 top
LOGO70  OSHW-LOGOS  [OSHW-LOGO-S]  47.24,75.95 0 bottom
LOGO71  LOGO-SFESK  [SFE-LOGO-FLAME]  38.86,74.8 0 bottom
LOGO72  SFE_LOGO_FLAME.1_INCH  [SFE_LOGO_FLAME_.1]  47.62,63.37 0 top
LOGO73  OSHW-LOGOS  [OSHW-LOGO-S]  61.72,75.95 0 bottom
LOGO74  LOGO-SFESK  [SFE-LOGO-FLAME]  53.34,74.8 0 bottom
LOGO75  SFE_LOGO_FLAME.1_INCH  [SFE_LOGO_FLAME_.1]  62.1,63.37 0 top
LOGO76  OSHW-LOGOS  [OSHW-LOGO-S]  76.2,75.95 0 bottom
LOGO77  LOGO-SFESK  [SFE-LOGO-FLAME]  67.82,74.8 0 bottom
LOGO78  SFE_LOGO_FLAME.1_INCH  [SFE_LOGO_FLAME_.1]  76.58,63.37 0 top
LOGO79  OSHW-LOGOS  [OSHW-LOGO-S]  90.68,75.95 0 bottom
LOGO80  LOGO-SFESK  [SFE-LOGO-FLAME]  82.3,74.8 0 bottom
LOGO81  SFE_LOGO_FLAME.1_INCH  [SFE_LOGO_FLAME_.1]  91.06,63.37 0 top
LOGO82  OSHW-LOGOS  [OSHW-LOGO-S]  105.16,75.95 0 bottom
LOGO83  LOGO-SFESK  [SFE-LOGO-FLAME]  96.77,74.8 0 bottom
LOGO84  SFE_LOGO_FLAME.1_INCH  [SFE_LOGO_FLAME_.1]  105.54,63.37 0 top
LOGO85  OSHW-LOGOS  [OSHW-LOGO-S]  18.29,94.23 0 bottom
LOGO86  LOGO-SFESK  [SFE-LOGO-FLAME]  9.91,93.09 0 bottom
LOGO87  SFE_LOGO_FLAME.1_INCH  [SFE_LOGO_FLAME_.1]  18.67,81.66 0 top
LOGO88  OSHW-LOGOS  [OSHW-LOGO-S]  32.77,94.23 0 bottom
LOGO89  LOGO-SFESK  [SFE-LOGO-FLAME]  24.38,93.09 0 bottom
LOGO90  SFE_LOGO_FLAME.1_INCH  [SFE_LOGO_FLAME_.1]  33.15,81.66 0 top
LOGO91  OSHW-LOGOS  [OSHW-LOGO-S]  47.24,94.23 0 bottom
LOGO92  LOGO-SFESK  [SFE-LOGO-FLAME]  38.86,93.09 0 bottom
LOGO93  SFE_LOGO_FLAME.1_INCH  [SFE_LOGO_FLAME_.1]  47.62,81.66 0 top
LOGO94  OSHW-LOGOS  [OSHW-LOGO-S]  61.72,94.23 0 bottom
LOGO95  LOGO-SFESK  [SFE-LOGO-FLAME]  53.34,93.09 0 bottom
LOGO96  SFE_LOGO_FLAME.1_INCH  [SFE_LOGO_FLAME_.1]  62.1,81.66 0 top
LOGO97  OSHW-LOGOS  [OSHW-LOGO-S]  76.2,94.23 0 bottom
LOGO98  LOGO-SFESK  [SFE-LOGO-FLAME]  67.82,93.09 0 bottom
LOGO99  SFE_LOGO_FLAME.1_INCH  [SFE_LOGO_FLAME_.1]  76.58,81.66 0 top
LOGO100  OSHW-LOGOS  [OSHW-LOGO-S]  90.68,94.23 0 bottom
LOGO101  LOGO-SFESK  [SFE-LOGO-FLAME]  82.3,93.09 0 bottom
LOGO102  SFE_LOGO_FLAME.1_INCH  [SFE_LOGO_FLAME_.1]  91.06,81.66 0 top
LOGO103  OSHW-LOGOS  [OSHW-LOGO-S]  105.16,94.23 0 bottom
LOGO104  LOGO-SFESK  [SFE-LOGO-FLAME]  96.77,93.09 0 bottom
LOGO105  SFE_LOGO_FLAME.1_INCH  [SFE_LOGO_FLAME_.1]  105.54,81.66 0 top
LOGO106  OSHW-LOGOS  [OSHW-LOGO-S]  18.29,112.52 0 bottom
LOGO107  LOGO-SFESK  [SFE-LOGO-FLAME]  9.91,111.38 0 bottom
LOGO108  SFE_LOGO_FLAME.1_INCH  [SFE_LOGO_FLAME_.1]  18.67,99.95 0 top
LOGO109  OSHW-LOGOS  [OSHW-LOGO-S]  32.77,112.52 0 bottom
LOGO110  LOGO-SFESK  [SFE-LOGO-FLAME]  24.38,111.38 0 bottom
LOGO111  SFE_LOGO_FLAME.1_INCH  [SFE_LOGO_FLAME_.1]  33.15,99.95 0 top
LOGO112  OSHW-LOGOS  [OSHW-LOGO-S]  47.24,112.52 0 bottom
LOGO113  LOGO-SFESK  [SFE-LOGO-FLAME]  38.86,111.38 0 bottom
LOGO114  SFE_LOGO_FLAME.1_INCH  [SFE_LOGO_FLAME_.1]  47.62,99.95 0 top
LOGO115  OSHW-LOGOS  [OSHW-LOGO-S]  61.72,112.52 0 bottom
LOGO116  LOGO-SFESK  [SFE-LOGO-FLAME]  53.34,111.38 0 bottom
LOGO117  SFE_LOGO_FLAME.1_INCH  [SFE_LOGO_FLAME_.1]  62.1,99.95 0 top
LOGO118  OSHW-LOGOS  [OSHW-LOGO-S]  76.2,112.52 0 bottom
LOGO119  LOGO-SFESK  [SFE-LOGO-FLAME]  67.82,111.38 0 bottom
LOGO120  SFE_LOGO_FLAME.1_INCH  [SFE_LOGO_FLAME_.1]  76.58,99.95 0 top
LOGO121  OSHW-LOGOS  [OSHW-LOGO-S]  90.68,112.52 0 bottom
LOGO122  LOGO-SFESK  [SFE-LOGO-FLAME]  82.3,111.38 0 bottom
LOGO123  SFE_LOGO_FLAME.1_INCH  [SFE_LOGO_FLAME_.1]  91.06,99.95 0 top
LOGO124  OSHW-LOGOS  [OSHW-LOGO-S]  105.16,112.52 0 bottom
LOGO125  LOGO-SFESK  [SFE-LOGO-FLAME]  96.77,111.38 0 bottom
LOGO126  SFE_LOGO_FLAME.1_INCH  [SFE_LOGO_FLAME_.1]  105.54,99.95 0 top
LOGO127  OSHW-LOGOS  [OSHW-LOGO-S]  18.29,130.81 0 bottom
LOGO128  LOGO-SFESK  [SFE-LOGO-FLAME]  9.91,129.67 0 bottom
LOGO129  SFE_LOGO_FLAME.1_INCH  [SFE_LOGO_FLAME_.1]  18.67,118.24 0 top
LOGO130  OSHW-LOGOS  [OSHW-LOGO-S]  32.77,130.81 0 bottom
LOGO131  LOGO-SFESK  [SFE-LOGO-FLAME]  24.38,129.67 0 bottom
LOGO132  SFE_LOGO_FLAME.1_INCH  [SFE_LOGO_FLAME_.1]  33.15,118.24 0 top
LOGO133  OSHW-LOGOS  [OSHW-LOGO-S]  47.24,130.81 0 bottom
LOGO134  LOGO-SFESK  [SFE-LOGO-FLAME]  38.86,129.67 0 bottom
LOGO135  SFE_LOGO_FLAME.1_INCH  [SFE_LOGO_FLAME_.1]  47.62,118.24 0 top
LOGO136  OSHW-LOGOS  [OSHW-LOGO-S]  61.72,130.81 0 bottom
LOGO137  LOGO-SFESK  [SFE-LOGO-FLAME]  53.34,129.67 0 bottom
LOGO138  SFE_LOGO_FLAME.1_INCH  [SFE_LOGO_FLAME_.1]  62.1,118.24 0 top
LOGO139  OSHW-LOGOS  [OSHW-LOGO-S]  76.2,130.81 0 bottom
LOGO140  LOGO-SFESK  [SFE-LOGO-FLAME]  67.82,129.67 0 bottom
LOGO141  SFE_LOGO_FLAME.1_INCH  [SFE_LOGO_FLAME_.1]  76.58,118.24 0 top
LOGO142  OSHW-LOGOS  [OSHW-LOGO-S]  90.68,130.81 0 bottom
LOGO143  LOGO-SFESK  [SFE-LOGO-FLAME]  82.3,129.67 0 bottom
LOGO144  SFE_LOGO_FLAME.1_INCH  [SFE_LOGO_FLAME_.1]  91.06,118.24 0 top
LOGO145  OSHW-LOGOS  [OSHW-LOGO-S]  105.16,130.81 0 bottom
LOGO146  LOGO-SFESK  [SFE-LOGO-FLAME]  96.77,129.67 0 bottom
LOGO147  SFE_LOGO_FLAME.1_INCH  [SFE_LOGO_FLAME_.1]  105.54,118.24 0 top
LOGO148  OSHW-LOGOS  [OSHW-LOGO-S]  18.29,149.1 0 bottom
LOGO149  LOGO-SFESK  [SFE-LOGO-FLAME]  9.91,147.96 0 bottom
LOGO150  SFE_LOGO_FLAME.1_INCH  [SFE_LOGO_FLAME_.1]  18.67,136.53 0 top
LOGO151  OSHW-LOGOS  [OSHW-LOGO-S]  32.77,149.1 0 bottom
LOGO152  LOGO-SFESK  [SFE-LOGO-FLAME]  24.38,147.96 0 bottom
LOGO153  SFE_LOGO_FLAME.1_INCH  [SFE_LOGO_FLAME_.1]  33.15,136.53 0 top
LOGO154  OSHW-LOGOS  [OSHW-LOGO-S]  47.24,149.1 0 bottom
LOGO155  LOGO-SFESK  [SFE-LOGO-FLAME]  38.86,147.96 0 bottom
LOGO156  SFE_LOGO_FLAME.1_INCH  [SFE_LOGO_FLAME_.1]  47.62,136.53 0 top
LOGO157  OSHW-LOGOS  [OSHW-LOGO-S]  61.72,149.1 0 bottom
LOGO158  LOGO-SFESK  [SFE-LOGO-FLAME]  53.34,147.96 0 bottom
LOGO159  SFE_LOGO_FLAME.1_INCH  [SFE_LOGO_FLAME_.1]  62.1,136.53 0 top
LOGO160  OSHW-LOGOS  [OSHW-LOGO-S]  76.2,149.1 0 bottom
LOGO161  LOGO-SFESK  [SFE-LOGO-FLAME]  67.82,147.96 0 bottom
LOGO162  SFE_LOGO_FLAME.1_INCH  [SFE_LOGO_FLAME_.1]  76.58,136.53 0 top
LOGO163  OSHW-LOGOS  [OSHW-LOGO-S]  90.68,149.1 0 bottom
LOGO164  LOGO-SFESK  [SFE-LOGO-FLAME]  82.3,147.96 0 bottom
LOGO165  SFE_LOGO_FLAME.1_INCH  [SFE_LOGO_FLAME_.1]  91.06,136.53 0 top
LOGO166  OSHW-LOGOS  [OSHW-LOGO-S]  105.16,149.1 0 bottom
LOGO167  LOGO-SFESK  [SFE-LOGO-FLAME]  96.77,147.96 0 bottom
LOGO168  SFE_LOGO_FLAME.1_INCH  [SFE_LOGO_FLAME_.1]  105.54,136.53 0 top
LOGO169  OSHW-LOGOS  [OSHW-LOGO-S]  18.29,167.39 0 bottom
LOGO170  LOGO-SFESK  [SFE-LOGO-FLAME]  9.91,166.24 0 bottom
LOGO171  SFE_LOGO_FLAME.1_INCH  [SFE_LOGO_FLAME_.1]  18.67,154.81 0 top
LOGO172  OSHW-LOGOS  [OSHW-LOGO-S]  32.77,167.39 0 bottom
LOGO173  LOGO-SFESK  [SFE-LOGO-FLAME]  24.38,166.24 0 bottom
LOGO174  SFE_LOGO_FLAME.1_INCH  [SFE_LOGO_FLAME_.1]  33.15,154.81 0 top
LOGO175  OSHW-LOGOS  [OSHW-LOGO-S]  47.24,167.39 0 bottom
LOGO176  LOGO-SFESK  [SFE-LOGO-FLAME]  38.86,166.24 0 bottom
LOGO177  SFE_LOGO_FLAME.1_INCH  [SFE_LOGO_FLAME_.1]  47.62,154.81 0 top
LOGO178  OSHW-LOGOS  [OSHW-LOGO-S]  61.72,167.39 0 bottom
LOGO179  LOGO-SFESK  [SFE-LOGO-FLAME]  53.34,166.24 0 bottom
LOGO180  SFE_LOGO_FLAME.1_INCH  [SFE_LOGO_FLAME_.1]  62.1,154.81 0 top
LOGO181  OSHW-LOGOS  [OSHW-LOGO-S]  76.2,167.39 0 bottom
LOGO182  LOGO-SFESK  [SFE-LOGO-FLAME]  67.82,166.24 0 bottom
LOGO183  SFE_LOGO_FLAME.1_INCH  [SFE_LOGO_FLAME_.1]  76.58,154.81 0 top
LOGO184  OSHW-LOGOS  [OSHW-LOGO-S]  90.68,167.39 0 bottom
LOGO185  LOGO-SFESK  [SFE-LOGO-FLAME]  82.3,166.24 0 bottom
LOGO186  SFE_LOGO_FLAME.1_INCH  [SFE_LOGO_FLAME_.1]  91.06,154.81 0 top
LOGO187  OSHW-LOGOS  [OSHW-LOGO-S]  105.16,167.39 0 bottom
LOGO188  LOGO-SFESK  [SFE-LOGO-FLAME]  96.77,166.24 0 bottom
LOGO189  SFE_LOGO_FLAME.1_INCH  [SFE_LOGO_FLAME_.1]  105.54,154.81 0 top
Q1  220mA/50V/3.5Ω  [SOT23-3]  9.14,18.54 0 top
Q2  220mA/50V/3.5Ω  [SOT23-3]  12.45,18.54 0 top
Q3  220mA/50V/3.5Ω  [SOT23-3]  23.62,18.54 0 top
Q4  220mA/50V/3.5Ω  [SOT23-3]  26.92,18.54 0 top
Q5  220mA/50V/3.5Ω  [SOT23-3]  38.1,18.54 0 top
Q6  220mA/50V/3.5Ω  [SOT23-3]  41.4,18.54 0 top
Q7  220mA/50V/3.5Ω  [SOT23-3]  52.58,18.54 0 top
Q8  220mA/50V/3.5Ω  [SOT23-3]  55.88,18.54 0 top
Q9  220mA/50V/3.5Ω  [SOT23-3]  67.06,18.54 0 top
Q10  220mA/50V/3.5Ω  [SOT23-3]  70.36,18.54 0 top
Q11  220mA/50V/3.5Ω  [SOT23-3]  81.53,18.54 0 top
Q12  220mA/50V/3.5Ω  [SOT23-3]  84.84,18.54 0 top
Q13  220mA/50V/3.5Ω  [SOT23-3]  96.01,18.54 0 top
Q14  220mA/50V/3.5Ω  [SOT23-3]  99.31,18.54 0 top
Q15  220mA/50V/3.5Ω  [SOT23-3]  9.14,36.83 0 top
Q16  220mA/50V/3.5Ω  [SOT23-3]  12.45,36.83 0 top
Q17  220mA/50V/3.5Ω  [SOT23-3]  23.62,36.83 0 top
Q18  220mA/50V/3.5Ω  [SOT23-3]  26.92,36.83 0 top
Q19  220mA/50V/3.5Ω  [SOT23-3]  38.1,36.83 0 top
Q20  220mA/50V/3.5Ω  [SOT23-3]  41.4,36.83 0 top
Q21  220mA/50V/3.5Ω  [SOT23-3]  52.58,36.83 0 top
Q22  220mA/50V/3.5Ω  [SOT23-3]  55.88,36.83 0 top
Q23  220mA/50V/3.5Ω  [SOT23-3]  67.06,36.83 0 top
Q24  220mA/50V/3.5Ω  [SOT23-3]  70.36,36.83 0 top
Q25  220mA/50V/3.5Ω  [SOT23-3]  81.53,36.83 0 top
Q26  220mA/50V/3.5Ω  [SOT23-3]  84.84,36.83 0 top
Q27  220mA/50V/3.5Ω  [SOT23-3]  96.01,36.83 0 top
Q28  220mA/50V/3.5Ω  [SOT23-3]  99.31,36.83 0 top
Q29  220mA/50V/3.5Ω  [SOT23-3]  9.14,55.12 0 top
Q30  220mA/50V/3.5Ω  [SOT23-3]  12.45,55.12 0 top
Q31  220mA/50V/3.5Ω  [SOT23-3]  23.62,55.12 0 top
Q32  220mA/50V/3.5Ω  [SOT23-3]  26.92,55.12 0 top
Q33  220mA/50V/3.5Ω  [SOT23-3]  38.1,55.12 0 top
Q34  220mA/50V/3.5Ω  [SOT23-3]  41.4,55.12 0 top
Q35  220mA/50V/3.5Ω  [SOT23-3]  52.58,55.12 0 top
Q36  220mA/50V/3.5Ω  [SOT23-3]  55.88,55.12 0 top
Q37  220mA/50V/3.5Ω  [SOT23-3]  67.06,55.12 0 top
Q38  220mA/50V/3.5Ω  [SOT23-3]  70.36,55.12 0 top
Q39  220mA/50V/3.5Ω  [SOT23-3]  81.53,55.12 0 top
Q40  220mA/50V/3.5Ω  [SOT23-3]  84.84,55.12 0 top
Q41  220mA/50V/3.5Ω  [SOT23-3]  96.01,55.12 0 top
Q42  220mA/50V/3.5Ω  [SOT23-3]  99.31,55.12 0 top
Q43  220mA/50V/3.5Ω  [SOT23-3]  9.14,73.41 0 top
Q44  220mA/50V/3.5Ω  [SOT23-3]  12.45,73.41 0 top
Q45  220mA/50V/3.5Ω  [SOT23-3]  23.62,73.41 0 top
Q46  220mA/50V/3.5Ω  [SOT23-3]  26.92,73.41 0 top
Q47  220mA/50V/3.5Ω  [SOT23-3]  38.1,73.41 0 top
Q48  220mA/50V/3.5Ω  [SOT23-3]  41.4,73.41 0 top
Q49  220mA/50V/3.5Ω  [SOT23-3]  52.58,73.41 0 top
Q50  220mA/50V/3.5Ω  [SOT23-3]  55.88,73.41 0 top
Q51  220mA/50V/3.5Ω  [SOT23-3]  67.06,73.41 0 top
Q52  220mA/50V/3.5Ω  [SOT23-3]  70.36,73.41 0 top
Q53  220mA/50V/3.5Ω  [SOT23-3]  81.53,73.41 0 top
Q54  220mA/50V/3.5Ω  [SOT23-3]  84.84,73.41 0 top
Q55  220mA/50V/3.5Ω  [SOT23-3]  96.01,73.41 0 top
Q56  220mA/50V/3.5Ω  [SOT23-3]  99.31,73.41 0 top
Q57  220mA/50V/3.5Ω  [SOT23-3]  9.14,91.69 0 top
Q58  220mA/50V/3.5Ω  [SOT23-3]  12.45,91.69 0 top
Q59  220mA/50V/3.5Ω  [SOT23-3]  23.62,91.69 0 top
Q60  220mA/50V/3.5Ω  [SOT23-3]  26.92,91.69 0 top
Q61  220mA/50V/3.5Ω  [SOT23-3]  38.1,91.69 0 top
Q62  220mA/50V/3.5Ω  [SOT23-3]  41.4,91.69 0 top
Q63  220mA/50V/3.5Ω  [SOT23-3]  52.58,91.69 0 top
Q64  220mA/50V/3.5Ω  [SOT23-3]  55.88,91.69 0 top
Q65  220mA/50V/3.5Ω  [SOT23-3]  67.06,91.69 0 top
Q66  220mA/50V/3.5Ω  [SOT23-3]  70.36,91.69 0 top
Q67  220mA/50V/3.5Ω  [SOT23-3]  81.53,91.69 0 top
Q68  220mA/50V/3.5Ω  [SOT23-3]  84.84,91.69 0 top
Q69  220mA/50V/3.5Ω  [SOT23-3]  96.01,91.69 0 top
Q70  220mA/50V/3.5Ω  [SOT23-3]  99.31,91.69 0 top
Q71  220mA/50V/3.5Ω  [SOT23-3]  9.14,109.98 0 top
Q72  220mA/50V/3.5Ω  [SOT23-3]  12.45,109.98 0 top
Q73  220mA/50V/3.5Ω  [SOT23-3]  23.62,109.98 0 top
Q74  220mA/50V/3.5Ω  [SOT23-3]  26.92,109.98 0 top
Q75  220mA/50V/3.5Ω  [SOT23-3]  38.1,109.98 0 top
Q76  220mA/50V/3.5Ω  [SOT23-3]  41.4,109.98 0 top
Q77  220mA/50V/3.5Ω  [SOT23-3]  52.58,109.98 0 top
Q78  220mA/50V/3.5Ω  [SOT23-3]  55.88,109.98 0 top
Q79  220mA/50V/3.5Ω  [SOT23-3]  67.06,109.98 0 top
Q80  220mA/50V/3.5Ω  [SOT23-3]  70.36,109.98 0 top
Q81  220mA/50V/3.5Ω  [SOT23-3]  81.53,109.98 0 top
Q82  220mA/50V/3.5Ω  [SOT23-3]  84.84,109.98 0 top
Q83  220mA/50V/3.5Ω  [SOT23-3]  96.01,109.98 0 top
Q84  220mA/50V/3.5Ω  [SOT23-3]  99.31,109.98 0 top
Q85  220mA/50V/3.5Ω  [SOT23-3]  9.14,128.27 0 top
Q86  220mA/50V/3.5Ω  [SOT23-3]  12.45,128.27 0 top
Q87  220mA/50V/3.5Ω  [SOT23-3]  23.62,128.27 0 top
Q88  220mA/50V/3.5Ω  [SOT23-3]  26.92,128.27 0 top
Q89  220mA/50V/3.5Ω  [SOT23-3]  38.1,128.27 0 top
Q90  220mA/50V/3.5Ω  [SOT23-3]  41.4,128.27 0 top
Q91  220mA/50V/3.5Ω  [SOT23-3]  52.58,128.27 0 top
Q92  220mA/50V/3.5Ω  [SOT23-3]  55.88,128.27 0 top
Q93  220mA/50V/3.5Ω  [SOT23-3]  67.06,128.27 0 top
Q94  220mA/50V/3.5Ω  [SOT23-3]  70.36,128.27 0 top
Q95  220mA/50V/3.5Ω  [SOT23-3]  81.53,128.27 0 top
Q96  220mA/50V/3.5Ω  [SOT23-3]  84.84,128.27 0 top
Q97  220mA/50V/3.5Ω  [SOT23-3]  96.01,128.27 0 top
Q98  220mA/50V/3.5Ω  [SOT23-3]  99.31,128.27 0 top
Q99  220mA/50V/3.5Ω  [SOT23-3]  9.14,146.56 0 top
Q100  220mA/50V/3.5Ω  [SOT23-3]  12.45,146.56 0 top
Q101  220mA/50V/3.5Ω  [SOT23-3]  23.62,146.56 0 top
Q102  220mA/50V/3.5Ω  [SOT23-3]  26.92,146.56 0 top
Q103  220mA/50V/3.5Ω  [SOT23-3]  38.1,146.56 0 top
Q104  220mA/50V/3.5Ω  [SOT23-3]  41.4,146.56 0 top
Q105  220mA/50V/3.5Ω  [SOT23-3]  52.58,146.56 0 top
Q106  220mA/50V/3.5Ω  [SOT23-3]  55.88,146.56 0 top
Q107  220mA/50V/3.5Ω  [SOT23-3]  67.06,146.56 0 top
Q108  220mA/50V/3.5Ω  [SOT23-3]  70.36,146.56 0 top
Q109  220mA/50V/3.5Ω  [SOT23-3]  81.53,146.56 0 top
Q110  220mA/50V/3.5Ω  [SOT23-3]  84.84,146.56 0 top
Q111  220mA/50V/3.5Ω  [SOT23-3]  96.01,146.56 0 top
Q112  220mA/50V/3.5Ω  [SOT23-3]  99.31,146.56 0 top
Q113  220mA/50V/3.5Ω  [SOT23-3]  9.14,164.85 0 top
Q114  220mA/50V/3.5Ω  [SOT23-3]  12.45,164.85 0 top
Q115  220mA/50V/3.5Ω  [SOT23-3]  23.62,164.85 0 top
Q116  220mA/50V/3.5Ω  [SOT23-3]  26.92,164.85 0 top
Q117  220mA/50V/3.5Ω  [SOT23-3]  38.1,164.85 0 top
Q118  220mA/50V/3.5Ω  [SOT23-3]  41.4,164.85 0 top
Q119  220mA/50V/3.5Ω  [SOT23-3]  52.58,164.85 0 top
Q120  220mA/50V/3.5Ω  [SOT23-3]  55.88,164.85 0 top
Q121  220mA/50V/3.5Ω  [SOT23-3]  67.06,164.85 0 top
Q122  220mA/50V/3.5Ω  [SOT23-3]  70.36,164.85 0 top
Q123  220mA/50V/3.5Ω  [SOT23-3]  81.53,164.85 0 top
Q124  220mA/50V/3.5Ω  [SOT23-3]  84.84,164.85 0 top
Q125  220mA/50V/3.5Ω  [SOT23-3]  96.01,164.85 0 top
Q126  220mA/50V/3.5Ω  [SOT23-3]  99.31,164.85 0 top
R1  10k  [0603]  15.29,18.69 270 top
R2  10k  [0603]  29.77,18.69 270 top
R3  10k  [0603]  22.86,22.1 90 top
R4  10k  [0603]  23.62,16 180 top
R5  10k  [0603]  26.92,16 180 top
R6  10k  [0603]  24.64,22.1 90 top
R7  10k  [0603]  8.38,22.1 90 top
R8  10k  [0603]  9.14,16 180 top
R9  10k  [0603]  12.45,16 180 top
R10  10k  [0603]  10.16,22.1 90 top
R11  10k  [0603]  44.25,18.69 270 top
R12  10k  [0603]  37.34,22.1 90 top
R13  10k  [0603]  38.1,16 180 top
R14  10k  [0603]  41.4,16 180 top
R15  10k  [0603]  39.12,22.1 90 top
R16  10k  [0603]  58.72,18.69 270 top
R17  10k  [0603]  51.82,22.1 90 top
R18  10k  [0603]  52.58,16 180 top
R19  10k  [0603]  55.88,16 180 top
R20  10k  [0603]  53.59,22.1 90 top
R21  10k  [0603]  73.2,18.69 270 top
R22  10k  [0603]  66.29,22.1 90 top
R23  10k  [0603]  67.06,16 180 top
R24  10k  [0603]  70.36,16 180 top
R25  10k  [0603]  68.07,22.1 90 top
R26  10k  [0603]  87.68,18.69 270 top
R27  10k  [0603]  80.77,22.1 90 top
R28  10k  [0603]  81.53,16 180 top
R29  10k  [0603]  84.84,16 180 top
R30  10k  [0603]  82.55,22.1 90 top
R31  10k  [0603]  102.16,18.69 270 top
R32  10k  [0603]  95.25,22.1 90 top
R33  10k  [0603]  96.01,16 180 top
R34  10k  [0603]  99.31,16 180 top
R35  10k  [0603]  97.03,22.1 90 top
R36  10k  [0603]  15.29,36.98 270 top
R37  10k  [0603]  8.38,40.39 90 top
R38  10k  [0603]  9.14,34.29 180 top
R39  10k  [0603]  12.45,34.29 180 top
R40  10k  [0603]  10.16,40.39 90 top
R41  10k  [0603]  29.77,36.98 270 top
R42  10k  [0603]  22.86,40.39 90 top
R43  10k  [0603]  23.62,34.29 180 top
R44  10k  [0603]  26.92,34.29 180 top
R45  10k  [0603]  24.64,40.39 90 top
R46  10k  [0603]  44.25,36.98 270 top
R47  10k  [0603]  37.34,40.39 90 top
R48  10k  [0603]  38.1,34.29 180 top
R49  10k  [0603]  41.4,34.29 180 top
R50  10k  [0603]  39.12,40.39 90 top
R51  10k  [0603]  58.72,36.98 270 top
R52  10k  [0603]  51.82,40.39 90 top
R53  10k  [0603]  52.58,34.29 180 top
R54  10k  [0603]  55.88,34.29 180 top
R55  10k  [0603]  53.59,40.39 90 top
R56  10k  [0603]  73.2,36.98 270 top
R57  10k  [0603]  66.29,40.39 90 top
R58  10k  [0603]  67.06,34.29 180 top
R59  10k  [0603]  70.36,34.29 180 top
R60  10k  [0603]  68.07,40.39 90 top
R61  10k  [0603]  87.68,36.98 270 top
R62  10k  [0603]  80.77,40.39 90 top
R63  10k  [0603]  81.53,34.29 180 top
R64  10k  [0603]  84.84,34.29 180 top
R65  10k  [0603]  82.55,40.39 90 top
R66  10k  [0603]  102.16,36.98 270 top
R67  10k  [0603]  95.25,40.39 90 top
R68  10k  [0603]  96.01,34.29 180 top
R69  10k  [0603]  99.31,34.29 180 top
R70  10k  [0603]  97.03,40.39 90 top
R71  10k  [0603]  15.29,55.27 270 top
R72  10k  [0603]  8.38,58.67 90 top
R73  10k  [0603]  9.14,52.58 180 top
R74  10k  [0603]  12.45,52.58 180 top
R75  10k  [0603]  10.16,58.67 90 top
R76  10k  [0603]  29.77,55.27 270 top
R77  10k  [0603]  22.86,58.67 90 top
R78  10k  [0603]  23.62,52.58 180 top
R79  10k  [0603]  26.92,52.58 180 top
R80  10k  [0603]  24.64,58.67 90 top
R81  10k  [0603]  44.25,55.27 270 top
R82  10k  [0603]  37.34,58.67 90 top
R83  10k  [0603]  38.1,52.58 180 top
R84  10k  [0603]  41.4,52.58 180 top
R85  10k  [0603]  39.12,58.67 90 top
R86  10k  [0603]  58.72,55.27 270 top
R87  10k  [0603]  51.82,58.67 90 top
R88  10k  [0603]  52.58,52.58 180 top
R89  10k  [0603]  55.88,52.58 180 top
R90  10k  [0603]  53.59,58.67 90 top
R91  10k  [0603]  73.2,55.27 270 top
R92  10k  [0603]  66.29,58.67 90 top
R93  10k  [0603]  67.06,52.58 180 top
R94  10k  [0603]  70.36,52.58 180 top
R95  10k  [0603]  68.07,58.67 90 top
R96  10k  [0603]  87.68,55.27 270 top
R97  10k  [0603]  80.77,58.67 90 top
R98  10k  [0603]  81.53,52.58 180 top
R99  10k  [0603]  84.84,52.58 180 top
R100  10k  [0603]  82.55,58.67 90 top
R101  10k  [0603]  102.16,55.27 270 top
R102  10k  [0603]  95.25,58.67 90 top
R103  10k  [0603]  96.01,52.58 180 top
R104  10k  [0603]  99.31,52.58 180 top
R105  10k  [0603]  97.03,58.67 90 top
R106  10k  [0603]  15.29,73.56 270 top
R107  10k  [0603]  8.38,76.96 90 top
R108  10k  [0603]  9.14,70.87 180 top
R109  10k  [0603]  12.45,70.87 180 top
R110  10k  [0603]  10.16,76.96 90 top
R111  10k  [0603]  29.77,73.56 270 top
R112  10k  [0603]  22.86,76.96 90 top
R113  10k  [0603]  23.62,70.87 180 top
R114  10k  [0603]  26.92,70.87 180 top
R115  10k  [0603]  24.64,76.96 90 top
R116  10k  [0603]  44.25,73.56 270 top
R117  10k  [0603]  37.34,76.96 90 top
R118  10k  [0603]  38.1,70.87 180 top
R119  10k  [0603]  41.4,70.87 180 top
R120  10k  [0603]  39.12,76.96 90 top
R121  10k  [0603]  58.72,73.56 270 top
R122  10k  [0603]  51.82,76.96 90 top
R123  10k  [0603]  52.58,70.87 180 top
R124  10k  [0603]  55.88,70.87 180 top